# Altium PCB Group24_87557913_98040483_PCB_Wacky_R_CAR.PcbDoc (part 1 of 2)
Units mm, origin at the board's own origin, x right, y up, seen from the top; angles counter-clockwise.
Board outline 64 x 85 mm, 4 copper layers (Top Layer, Int1 (GND), Int2 (PWR), Bottom Layer), stack 1.369 mm thick; 115 components, 69 nets, 321 pads, 83 vias.
Unrouted connection lines stored in the file: 71.
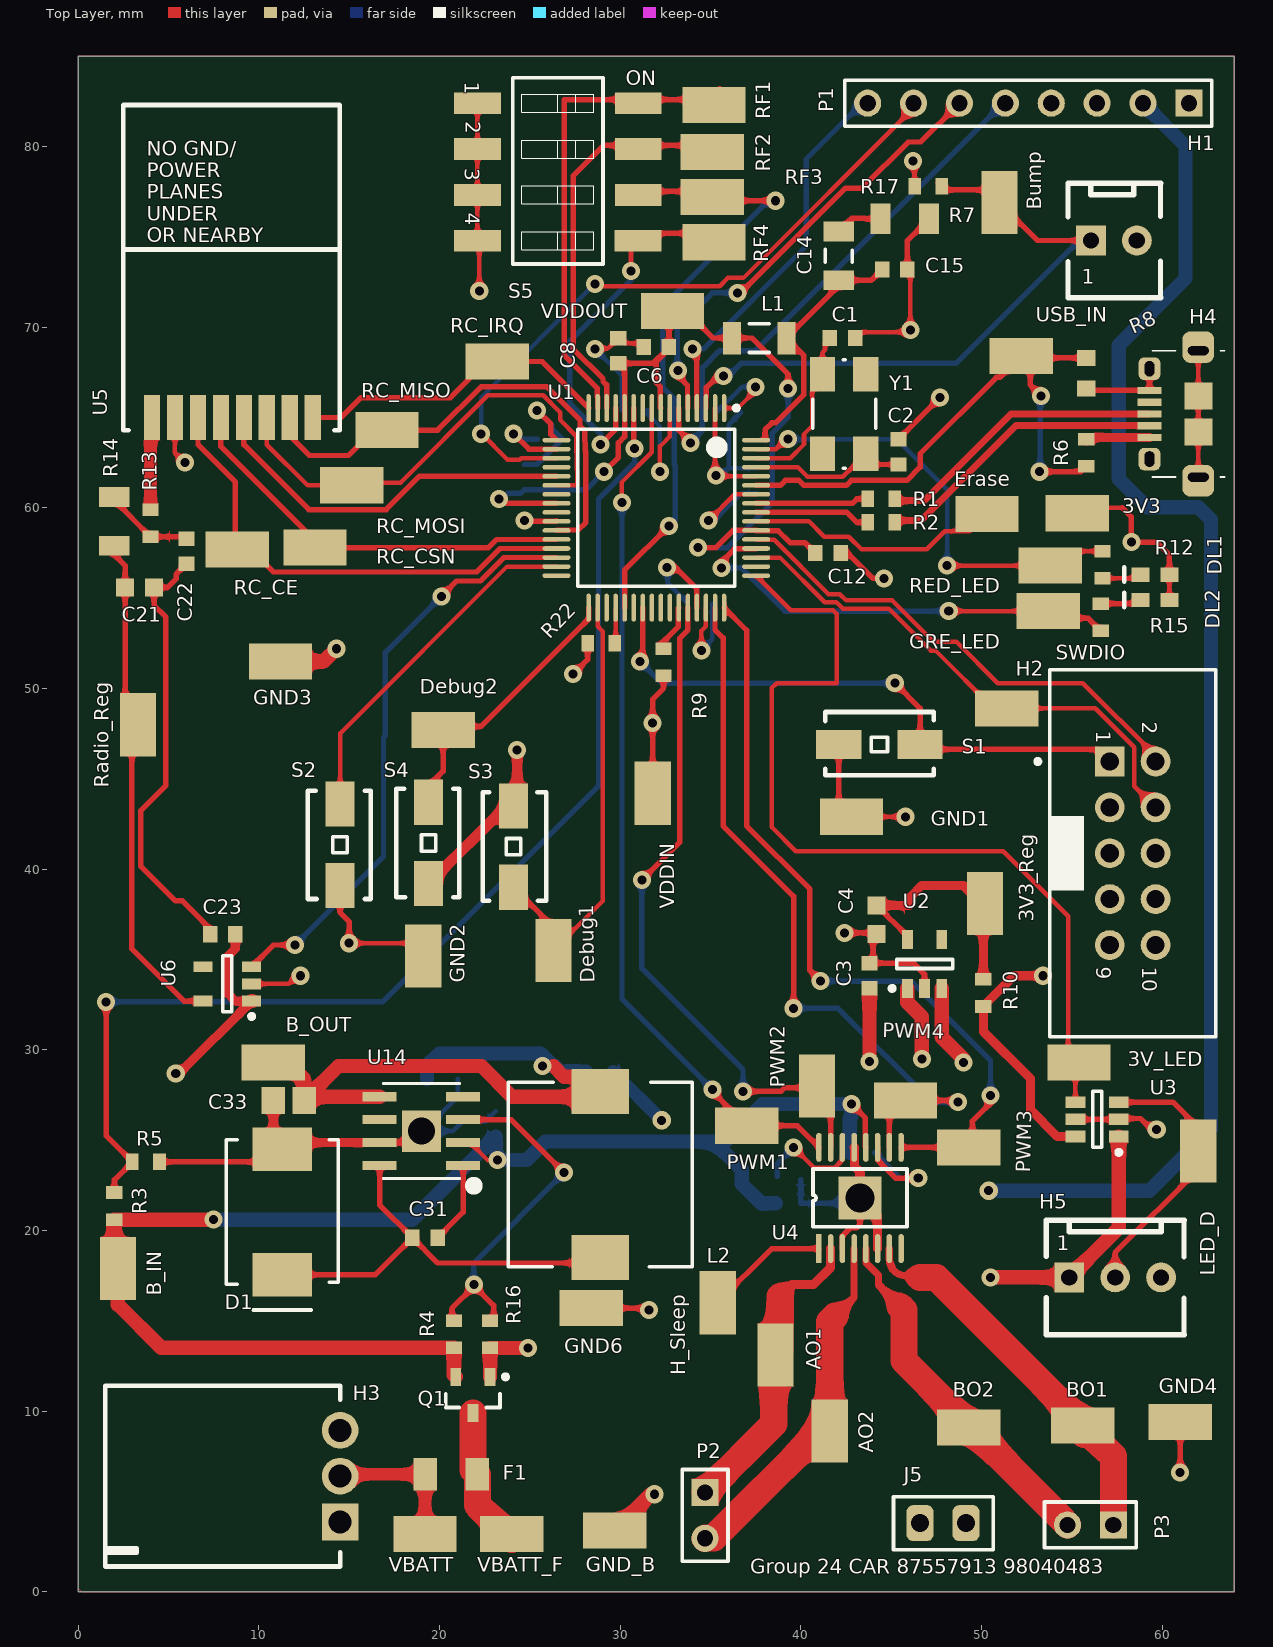
[diagram p0: Top Layer view]
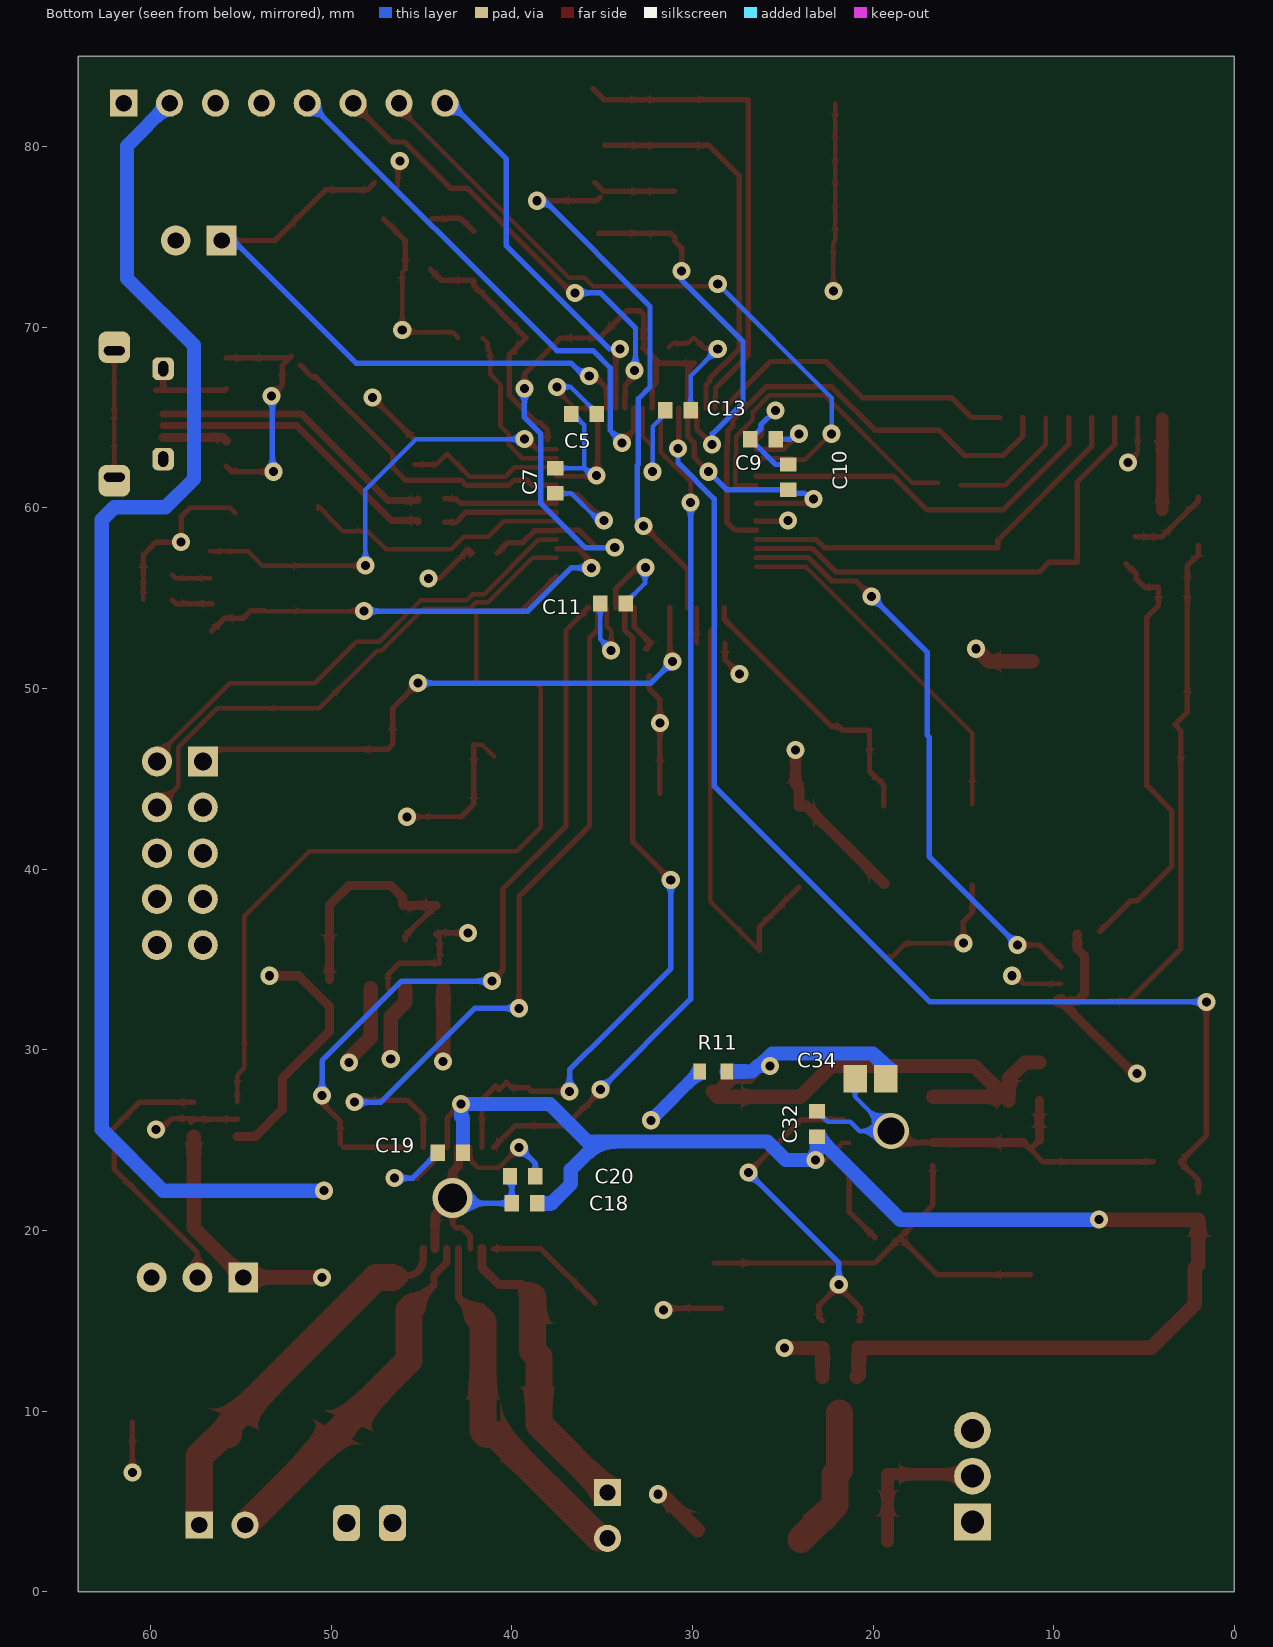
[diagram p1: Bottom Layer view, seen from below]
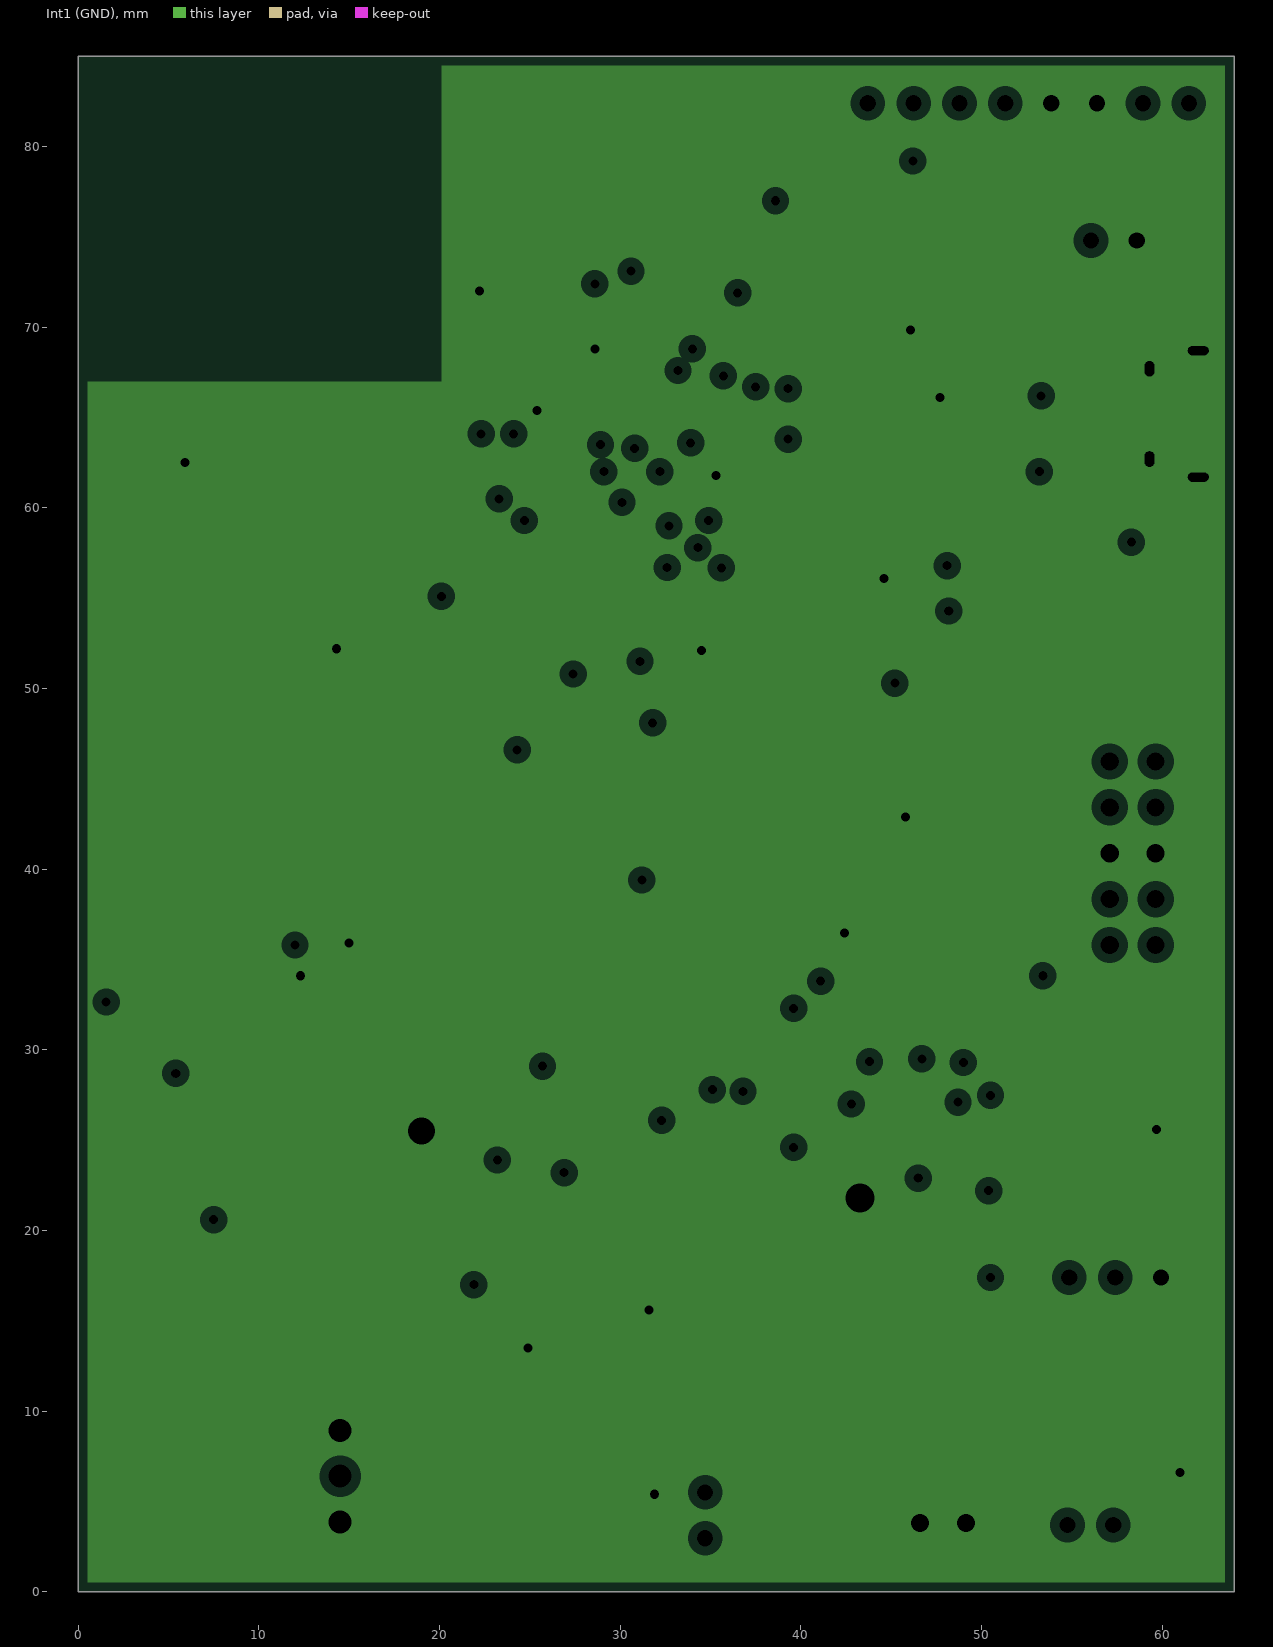
[diagram p2: Int1 (GND), clearances drawn from the general rule]
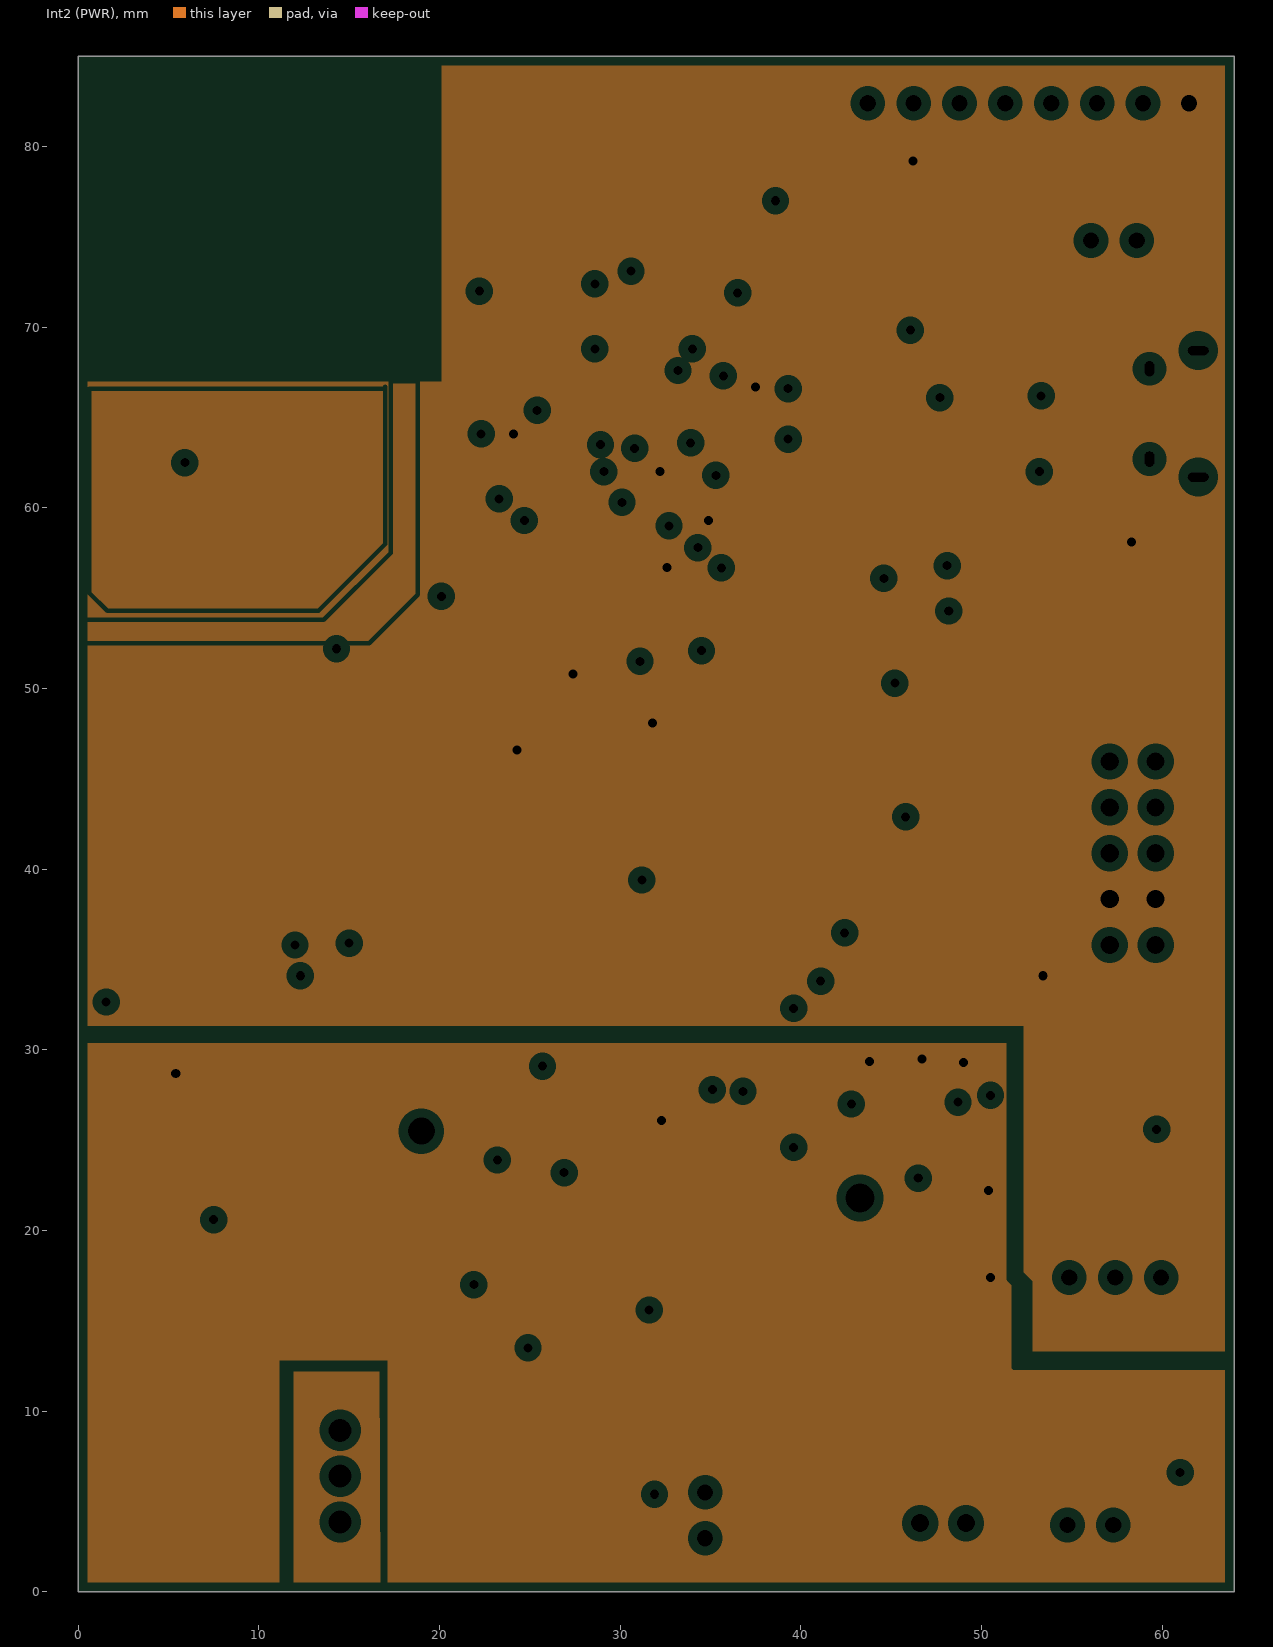
[diagram p3: Int2 (PWR), clearances drawn from the general rule]

## Layer stack, top to bottom
Top Solder: solder mask 0.0254, SM-001, Dk 4
Top Layer: signal copper 0.035
Dielectric 1: prepreg 0.1295, PP-017, Dk 4.3
Dielectric 2: prepreg 0.1295, PP-017, Dk 4.3
Int1 (GND): plane copper 0.035, net GND
Dielectric 3: core 0.7112, Core-039, Dk 4.8
Int2 (PWR): plane copper 0.035, net (Multiple Nets)
Dielectric 4: prepreg 0.1295, PP-017, Dk 4.3
Dielectric 5: prepreg 0.1295, PP-017, Dk 4.3
Bottom Layer: signal copper 0.035
Bottom Solder: solder mask 0.0254, SM-001, Dk 4

## Board outline
0,85 64,85 64,0 0,0 0,85

## Design rules (kind name [scope] priority, off if disabled: settings)
BoardOutlineClearance [All] p1: gap=0.5 ignorepadtopadclearanceinfootprint=FALSE
Clearance GND_POLY [InNamedPolygon('GND')] p1: gap=0.254 ignorepadtopadclearanceinfootprint=FALSE
Clearance Min_Clearance_Circuit_Labs [All] p2: gap=0.2 ignorepadtopadclearanceinfootprint=FALSE
DiffPairsRouting [All] p1: maxlimit=0.254 minlimit=0.254 mostfreqgap=0.254 toplayer_minwidth=0.381 toplayer_maxwidth=0.381 toplayer_prefwidth=0.381 bottomlayer_minwidth=0.381 bottomlayer_maxwidth=0.381 bottomlayer_prefwidth=0.381 maxuncoupledlength=12.7
FanoutControl Fanout_BGA [IsBGA] p1 off: bgadir=Out bgaviamode=Centered fanoutstyle=Auto fanoutdirection=Alternating viagrid=0.025 // Fanout_BGA (Default Rule)
Height [All] p1: minheight=0 maxheight=50.8 prefheight=12.7
HoleSize [All] p1: absolutevalues=TRUE maxlimit=10 minlimit=0.3 maxpercent=80.000 minpercent=20.000
MinimumAnnularRing [All] p1: minimumring=0.1
MinimumSolderMaskSliver [All] p1: minsoldermaskwidth=0.102
NetAntennae [All] p1: netantennaetolerance=1
PlaneClearance [All] p1: clearance=0.508
PlaneConnect [All] p1: planeconnectstyle=Relief reliefexpansion=0.508 reliefentries=4 reliefconductorwidth=0.254 reliefairgap=0.254
PolygonConnect [All] p1: connectstyle=Relief reliefconductorwidth=0.305 reliefentries=4 polygonreliefangle="90 Angle" airgapwidth=0.254
RoutingVias [All] p1: holewidth=0.5 width=1 viastyle="Through Hole" minholewidth=0.3 minwidth=0.8 maxholewidth=1 maxwidth=2
SMDNeckDown [All] p1 off: percent=50.000
SMDToCorner [All] p1: distance=98425
SMDToPlane [All] p1: distance=1968504
SilkToSolderMaskClearance SilkscreenOverComponentPads [IsPad] p1: minsilkscreentomaskgap=0.2 clearancetoexposedcopper=TRUE
SolderMaskExpansion [All] p1: expansion=0.102
ViasUnderSMD [All] p1: allowed=FALSE
Width [All] p1: maxlimit=2 minlimit=0.2 preferedwidth=0.3
21 further rules are at their usual default settings.

## Classes and differential pairs
component class Wacky_Racers_extras: 3V_LED AO1 AO2 BO1 BO2 C18 C19 C20 C21 C22 C23 Debug1 Debug2 DL1 DL2 GND6 GRE_LED H4 H5 H_Sleep LED_D P2 P3 PWM1 PWM2 PWM3 PWM4 R6 R8 R12 R13 R14 R15 Radio_Reg RC_CE RC_CSN RC_IRQ RC_MISO RC_MOSI RED_LED RF1 RF2 RF3 RF4 S3 S4 S5 U3 U4 U5 U6 USB_IN
component class Wacky_Racers_87557913: 3V3 3V3_Reg B_IN B_OUT Bump C1 C2 C3 C4 C5 C6 C7 C8 C9 C10 C11 C12 C13 C14 C15 C31 C32 C33 C34 D1 Erase F1 GND1 GND2 GND3 GND4 GND_B H1 H2 H3 J5 L1 L2 P1 Q1 R1 R2 R3 R4 R5 R7 R9 R10 R11 R16 R17 R22 S1 S2 SWDIO U1 U2 U14 VBATT VBATT_F VDDIN VDDOUT Y1
differential pair D: +D_P -D_N

## Components (designator, comment, footprint, x,y, rotation, side; value= is the part's Value field where it differs from the comment)
3V3 "TP" TP_1206 55.3,59.7 r0 top
3V3_Reg "TP" TP_1206 50.2,38.1 r90 top
3V_LED "TP" TP_1206 55.4,29.3 r180 top
AO1 "TP" TP_1206 38.6,13.1 r90 top
AO2 "TP" TP_1206 41.6,8.9 r270 top
B_IN "TP" TP_1206 2.2,17.9 r90 top
B_OUT "TP" TP_1206 10.8,29.3 r0 top
BO1 "TP" TP_1206 55.6,9.2 r0 top
BO2 "TP" TP_1206 49.3,9.1 r0 top
Bump "TP" TP_1206 51,76.9 r270 top
C1 "27pF" CAPC1608L 42.3,69.4 r180 top
C2 "27pF" CAPC1608L 45.4,63.1 r270 top
C3 "1uF" CAPC1608L 43.8,34.1 r270 top
C4 "4.7uF" CAPC1608N 44.2,37.2 r90 top
C5 "100nF" CAPC1608L 36,65.2 r180 bottom
C6 "100nF" CAPC1608L 32,68.9 r180 top
C7 "100nF" CAPC1608L 37.6,61.5 r270 bottom
C8 "100nF" CAPC1608L 29.9,68.7 r90 top
C9 "100nF" CAPC1608L 26.1,63.8 r180 bottom
C10 "100nF" CAPC1608L 24.7,61.7 r90 bottom
C11 "100nF" CAPC1608L 34.4,54.7 r180 bottom
C12 "100nF" CAPC1608L 41.5,57.5 r0 top
C13 "100nF" CAPC1608L 30.8,65.4 r180 bottom
C14 "47uF" CAPC3216L 42.1,73.95 r270 top
C15 "100nF" CAPC1608L 45.2,73.2 r180 top
C18 "10uF" CAPC1608L 39.3,21.5 r180 bottom
C19 "10nF" CAPC1608L 43.4,24.3 r180 bottom
C20 "2.2uF" CAPC1608L 39.4,23 r180 bottom
C21 "4.7uF" CAPC1608N 3.4,55.6 r180 top
C22 "10uF" CAPC1608L 6,57.6 r90 top
C23 "1uF" CAPC1608L 8,36.4 r0 top
C31 "100nF" CAPC1608L 19.2,19.6 r0 top
C32 "10uF" CAPC1608L 23.1,25.9 r270 bottom
C33 "CC_47uF_0805_6V3" CAPC2012N 11.65,27.2 r0 top
C34 "CC_47uF_0805_6V3" CAPC2012N 20.15,28.4 r180 bottom
D1 "VS-30BQ015-M3/9AT" SMC 11.3,21.025 r270 top
Debug1 "TP" TP_1206 26.3,35.5 r270 top
Debug2 "TP" TP_1206 20.2,47.7 r0 top
DL1 "Red" WL-SMCW0603 58.8,56.3 r0 top
DL2 "Green" WL-SMCW0603 58.8,54.9 r0 top
Erase "TP" TP_1206 50.3,59.65 r180 top
F1 "5A" RESC3216N 20.65,6.5 r180 top
GND1 "TP" TP_1206 42.8,42.9 r180 top
GND2 "TP" TP_1206 19.1,35.2 r270 top
GND3 "TP" TP_1206 11.2,51.5 r0 top
GND4 "TP" TP_1206 61,9.4 r0 top
GND6 "TP" TP_1206 28.4,15.7 r180 top
GND_B "TP" TP_1206 29.7,3.4 r0 top
GRE_LED "TP" TP_1206 53.7,54.3 r180 top
H1 "2 Pin Molex KK HDR" MOLEX_KK_2_HDR 56.06,74.8 r0 top
H2 "Header 5X2 Vert" IDC2.54-V10D 58.37,40.88 r270 top
H3 "Battery_HEADER_3pin" BATT_HEADER_3POS 14.5,6.4 r90 top
H4 "JS_USB_MICRO_B" FCI_USB_10118194-0001LF 63.45,65.2 r90 top
H5 "3 Pin Molex KK Hdr" MOLEX_KK_3_HDR 54.86,17.4 r0 top
H_Sleep "TP" TP_1206 35.4,16 r90 top
J5 "100Mil Jumper" JMP2.54 46.6,3.8 r0 top
L1 "1A max, Idc 0.3R," INDC3216L 37.7,69.4 r180 top
L2 "IND 5.2UH 6A" INDUCTOR5u2 28.9,23.1 r90 top
LED_D "TP" TP_1206 62,24.4 r90 top
P1 "JA_PIN_Header 8" HDR1X8 61.48,82.4 r180 top
P2 "JA_PIN_Header 2" HDR1X2 34.7,5.5 r270 top
P3 "JA_PIN_Header 2" HDR1X2 57.3,3.7 r180 top
PWM1 "TP" TP_1206 37,25.8 r180 top
PWM2 "TP" TP_1206 40.9,28 r90 top
PWM3 "TP" TP_1206 49.3,24.6 r0 top
PWM4 "TP" TP_1206 45.8,27.2 r0 top
Q1 "SSM3J328R,LF" SOT23_L 21.85,10.9 r270 top
R1 "27R" RESC1608L 44.45,60.5 r180 top
R2 "27R" RESC1608L 44.45,59.2 r180 top
R3 "150K" RESC1608L 2,21.35 r270 top
R4 "#NAME?" RESC1608L 20.8,14.25 r270 top value=180K
R5 "100K" RESC1608L 3.75,23.8 r180 top
R6 "27K" RESC1608L 55.8,63.05 r90 top
R7 "1R" RESC3216L 45.75,76 r180 top
R8 "47K" RESC1608N 55.8,67.45 r90 top
R9 "4K7" RESC1608L 32.4,51.45 r90 top
R10 "0R" RESC1608L 50.1,33.15 r270 top
R11 "0R" RESC1608L 28.85,28.8 r180 bottom
R12 "3K3" RESC1608L 56.7,56.85 r90 top
R13 "0R" RESC1608L 4,59.15 r90 top
R14 "1R" RESC3216L 2,59.25 r90 top
R15 "2K" RESC1608L 56.6,53.95 r270 top
R16 "56K" RESC1608L 22.8,14.25 r90 top
R17 "4K7" RESC1608L 47.05,77.8 r180 top
R22 "4K7" RESC1608L 28.95,52.5 r0 top
Radio_Reg "TP" TP_1206 3.3,48 r270 top
RC_CE "TP" TP_1206 8.8,57.7 r180 top
RC_CSN "TP" TP_1206 13.1,57.8 r0 top
RC_IRQ "TP" TP_1206 23.2,68.1 r0 top
RC_MISO "TP" TP_1206 17.1,64.3 r180 top
RC_MOSI "TP" TP_1206 15.146,61.25 r0 top
RED_LED "TP" TP_1206 53.8,56.8 r0 top
RF1 "TP" TP_1206 35.2,82.3 r0 top
RF2 "TP" TP_1206 35.1,79.7 r0 top
RF3 "TP" TP_1206 35.1,77.2 r0 top
RF4 "TP" TP_1206 35.2,74.7 r0 top
S1 "EVQPNF05M" EVQPNF05M 44.35,46.9 r0 top
S2 "EVQPNF05M" EVQPNF05M 14.5,41.35 r90 top
S3 "EVQPNF05M" EVQPNF05M 24.1,41.25 r270 top
S4 "EVQPNF05M" EVQPNF05M 19.4,41.45 r90 top
S5 "WS_SW DIP-4" "DIP_SW_4WAY_SMD -" 22.1,82.4 r270 top
SWDIO "TP" TP_1206 51.4,48.9 r180 top
U1 "ATSAM4S8BA-ANR" LQFP64_L 32,60 r270 top locked
U2 "CAT6219-330TDGT3" SOT95P280X145-5N 46.85,34.75 r90 top
U3 "SN74LVC1T45" SOT23-6_N 56.4,26.15 r180 top
U4 "DRV8833" "HTSOP16 DRV8833" 41,19 r90 top locked
U5 "nRF24 SMD" NRF24 2.486,64.3 r0 top
U6 "CAT6219-330TDGT3" SOT95P280X145-5N 8.25,33.65 r180 top
U14 "ADP2302ARDZ-5.0 BUCK" RD_8_1 19,25.5 r180 top locked value=Value
USB_IN "TP" TP_1206 52.2,68.4 r0 top
VBATT "TP" TP_1206 19.2,3.2 r0 top
VBATT_F "TP" TP_1206 24,3.2 r0 top
VDDIN "TP" TP_1206 31.8,44.2 r90 top
VDDOUT "TP" TP_1206 32.9,70.9 r180 top
Y1 "12MHz" 6.0X3.5-4 42.4,65.2 r90 top

## Footprints (in the part's own frame and the unit in brackets; to place one, negate y for a bottom-side part, rotate by r counter-clockwise, add the part's x,y. Pads: shape width x height; smd on the part's side, far side on the other; paste and mask are expansions set on the pad)
6.0X3.5-4 [mm] "4 SMD 6.0X3.5 mm No Lead Crystal"
  rect 1.9x1.4 smd: 1(-2.2,-1.2) 2(2.2,-1.2) 3(2.2,1.2) 4(-2.2,1.2)
  silkscreen extent -3,-1.75 3,1.75, body extent -3,-1.75 3,1.75, height 1.2
BATT_HEADER_3POS [mil]
  rect 80x80 hole 50: 1(-100,0)
  round 80 hole 50: 2(0,0) 3(100,0)
  silkscreen extent -197,0 197,512, body extent -197,-31 200,504, height 294
CAPC1608L [mm] "Chip Capacitor, Body 1.6x0.8mm, IPC High Density"
  rect 0.8x0.9 smd: 1(-0.7,0) 2(0.7,0)
  body extent -0.87,-0.48 0.87,0.48, height 0.85
CAPC1608N [mm] "Chip Capacitor, Body 1.6x0.8mm, IPC Medium Density"
  rect 1x1 smd: 1(-0.8,0) 2(0.8,0)
  body extent -0.87,-0.48 0.87,0.48, height 0.85
CAPC2012N [mm] "Chip Capacitor, Body 2.0x1.3mm, IPC Medium Density"
  rect 1.3x1.5 smd: 1(-0.85,0) 2(0.85,0)
  body extent -1.1,-0.72 1.1,0.72, height 1.1
CAPC3216L [mm] "Chip Capacitor, Body 3.2x1.6mm, IPC High Density"
  rect 1.1x1.7 smd: 1(-1.35,0) 2(1.35,0)
  silkscreen extent -0.35,-0.75 0.35,0.75, body extent -1.7,-0.9 1.7,0.9, height 1.35
"DIP_SW_4WAY_SMD -" [mm] "DIP Switch; 8 Leads"
  rect 1.2x2.6 smd: 1(0,0) 2(2.54,0) 3(5.08,0) 4(7.62,0) 5(7.62,8.89) 6(5.08,8.9) 7(2.54,8.9) 8(0,8.9)
  silkscreen extent -1.4,1.95 8.9,6.95
EVQPNF05M [mm] "Panansonic light touch SMD push button switch"
  rect 2.5x1.6 smd: 1(-2.25,0) 2(2.25,0)
  silkscreen extent -3,-1.7 3,1.8, body extent -3,-1.7 3,1.8, height 5
FCI_USB_10118194-0001LF [mm] "Micro USB B Type Receptacle"
  rect 0.4x1.35 smd mask+0.07: 1(-1.3,4.15) 2(-0.65,4.15) 3(0,4.15) 4(0.65,4.15) 5(1.3,4.15)
  rrect50% 1.75x1.75 hole 0.5 slot 1.15 at 90 deg copper offset -0.2,0 paste+0 mask+0.1: 6(-3.5,1.45)
  rrect50% 1.25x1.2 hole 0.55 slot 0.85 at 0 deg: 6(-2.5,4.15) 6(2.5,4.15)
  rect 1.5x1.55 smd: 6(-1,1.45) 6(1,1.45)
  rrect50% 1.75x1.75 hole 0.5 slot 1.15 at 90 deg copper offset 0.2,0 paste+0 mask+0.1: 6(3.5,1.45)
  silkscreen extent -3.5,0 3.5,4
HDR1X2 [mm] "Connector; Header; 2 Position"
  rect 1.5x1.5 hole 0.9: 1(0,0)
  round 1.5 hole 0.9: 2(2.54,0)
  silkscreen extent -1.27,-1.27 3.81,1.27, body extent -1.25,-1.25 3.79,1.25, height 8.54
HDR1X8 [mm] "Connector; Header; 8 Position"
  rect 1.5x1.5 hole 0.9: 1(0,0)
  round 1.5 hole 0.9: 2(2.54,0) 3(5.08,0) 4(7.62,0) 5(10.16,0) 6(12.7,0) 7(15.24,0) 8(17.78,0)
  silkscreen extent -1.27,-1.27 19.05,1.27, body extent -1.24,-1.3 19.04,1.2, height 8.54
"HTSOP16 DRV8833" [mm]
  rect 1.6x0.3 smd: 1(0,0)
  oval 1.6x0.3 smd: 2(0,-0.65) 3(0,-1.3) 4(0,-1.95) 5(0,-2.6) 6(0,-3.25) 7(0,-3.9) 8(0,-4.55) 9(5.6,-4.55) 10(5.6,-3.9) 11(5.6,-3.25) 12(5.6,-2.6) 13(5.6,-1.95) 14(5.6,-1.3) 15(5.6,-0.65) 16(5.6,0)
  rect 2.4x2.4 smd: 17(2.8,-2.275)
  silkscreen extent 1.2,-4.88 4.4,0.33, body extent -0.4,-4.77 6,0.23, height 1.13
IDC2.54-V10D [mm] "Connector; IDC, Low Profile Male Header, Thru-Hole; 10 Position; Vertical; Pitch 2.54 mm; Body 20.32 x 9.2 x 9.45 mm (LxWxH)"
  rect 1.65x1.65 hole 1: 1(-5.08,-1.27)
  round 1.65 hole 1: 2(-5.08,1.27) 3(-2.54,-1.27) 4(-2.54,1.27) 5(0,-1.27) 6(0,1.27) 7(2.54,-1.27) 8(2.54,1.27) 9(5.08,-1.27) 10(5.08,1.27)
  silkscreen extent -10.16,-5.37 10.16,4.6, body extent -10.16,-4.6 10.16,4.6, height 9.45
INDC3216L [mm] "Chip Inductor, Body 3.2x1.6mm, IPC High Density"
  rect 1x1.8 smd: 1(-1.5,0) 2(1.5,0)
  silkscreen extent -0.55,-0.8 0.55,0.8, body extent -1.75,-0.95 1.75,0.95, height 1.9
INDUCTOR5u2 [mm]
  rect 2.5x3.2 smd: 1(-4.6,0) 2(4.6,0)
  silkscreen extent -5.1,-5.1 5.1,5.1, body extent -5,-5 5,5, height 3.8
JMP2.54 [mm] "Jumper Change over 2.54mm"
  rrect50% 1.5x2 hole 1: 1(0,0) 2(2.544,0)
  silkscreen extent -1.47,-1.47 4.05,1.47, body extent -1.43,-1.43 4.05,1.43, height 8.45
LQFP64_L [mm] "Thin QFP, 64-Leads, Body 10x10mm, Pitch 0.5mm, IPC High Density"
  oval 1.55x0.25 smd mask+0.07: 1(-5.525,3.75) 2(-5.525,3.25) 3(-5.525,2.75) 4(-5.525,2.25) 5(-5.525,1.75) 6(-5.525,1.25) 7(-5.525,0.75) 8(-5.525,0.25) 9(-5.525,-0.25) 10(-5.525,-0.75) 11(-5.525,-1.25) 12(-5.525,-1.75) 13(-5.525,-2.25) 14(-5.525,-2.75) 15(-5.525,-3.25) 16(-5.525,-3.75) 33(5.525,-3.75) 34(5.525,-3.25) 35(5.525,-2.75) 36(5.525,-2.25) 37(5.525,-1.75) 38(5.525,-1.25) 39(5.525,-0.75) 40(5.525,-0.25) 41(5.525,0.25) 42(5.525,0.75) 43(5.525,1.25) 44(5.525,1.75) 45(5.525,2.25) 46(5.525,2.75) 47(5.525,3.25) 48(5.525,3.75)
  oval 0.25x1.55 smd mask+0.07: 17(-3.75,-5.525) 18(-3.25,-5.525) 19(-2.75,-5.525) 20(-2.25,-5.525) 21(-1.75,-5.525) 22(-1.25,-5.525) 23(-0.75,-5.525) 24(-0.25,-5.525) 25(0.25,-5.525) 26(0.75,-5.525) 27(1.25,-5.525) 28(1.75,-5.525) 29(2.25,-5.525) 30(2.75,-5.525) 31(3.25,-5.525) 32(3.75,-5.525) 49(3.75,5.525) 50(3.25,5.525) 51(2.75,5.525) 52(2.25,5.525) 53(1.75,5.525) 54(1.25,5.525) 55(0.75,5.525) 56(0.25,5.525) 57(-0.25,5.525) 58(-0.75,5.525) 59(-1.25,5.525) 60(-1.75,5.525) 61(-2.25,5.525) 62(-2.75,5.525) 63(-3.25,5.525) 64(-3.75,5.525)
  silkscreen extent -5.65,-4.35 4.35,4.55, body extent -5,-5 5,5, height 1.6
MOLEX_KK_2_HDR [mil] "MOLEX_KK_2_HDR"
  rect 65x65 hole 35.43: 1(0,0)
  round 65 hole 35.43: 2(100,0)
  silkscreen extent -50,-125 152,125, body extent -42,-124 152,126, height 420
MOLEX_KK_3_HDR [mil] "MOLEX_KK_3_HDR"
  rect 65x65 hole 35.43: 1(0,0)
  round 65 hole 35.43: 2(100,0) 3(200,0)
  silkscreen extent -50,-125 250,125, body extent -50,-114 250,114, height 461
NRF24 [mm]
  rect 0.9x2.5 smd: 1(1.6,0.7) 2(2.871,0.7) 3(4.143,0.7) 4(5.414,0.7) 5(6.686,0.7) 6(7.957,0.7) 7(9.229,0.7) 8(10.5,0.7)
  silkscreen extent 0,0 12,18, body extent 0,0 12,18, height 2.27
RD_8_1 [mil]
  rect 74x20 smd paste+0 mask+0: 1(-91,75) 2(-91,25) 3(-91,-25) 4(-91,-75) 5(91,-75) 6(91,-25) 7(91,25) 8(91,75)
  rect 84.65x90 smd paste-44.5 mask+0: EPAD(0,0)
  silkscreen extent -118,-104 84,123, body extent 0,0 10,10, height 10
RESC1608L [mm] "Chip Resistor, Body 1.6x0.8mm, IPC High Density"
  rect 0.7x0.9 smd: 1(-0.75,0) 2(0.75,0)
  body extent -0.85,-0.48 0.85,0.48, height 0.9
RESC1608N [mm] "Chip Resistor, Body 1.6x0.8mm, IPC Medium Density"
  rect 0.9x1 smd: 1(-0.85,0) 2(0.85,0)
  body extent -0.85,-0.48 0.85,0.48, height 0.6
RESC3216L [mm] "Chip Resistor, Body 3.1x1.6mm, IPC High Density"
  rect 1.1x1.7 smd: 1(-1.35,0) 2(1.35,0)
  body extent -1.68,-0.87 1.68,0.87, height 2.54
RESC3216N [mm] "Chip Resistor, Body 3.2x1.6mm, IPC Medium Density"
  rect 1.3x1.8 smd: 1(-1.45,0) 2(1.45,0)
  body extent -1.68,-0.87 1.68,0.87, height 0.71
SMC [mm] "DO-214-AB/SMC; 2 C-Bend Leads; Body 7.9 x 5.9 mm, inc. leads (LxW)"
  rect 2.4x3.3 smd: 1(-3.475,0) 2(3.475,0)
  silkscreen extent -4,-3.1 5.43,3.1
SOT23-6_N [mm]
  rect 1.1x0.65 smd: 1(-1.2,0.95) 2(-1.2,0) 3(-1.2,-0.95) 4(1.2,-0.95) 5(1.2,0) 6(1.2,0.95)
  silkscreen extent -1.33,-1.55 0.25,1.95, body extent -0.9,-1.55 0.9,1.55, height 1.45
SOT23_L [mm] "SOT23, 3-Leads, Body 2.9x1.3mm, Pitch 0.95mm, Lead Span 2.3mm, IPC High Density"
  rect 1x0.6 smd: 1(-1,0.95) 2(-1,-0.95) 3(1,0)
  silkscreen extent -1.12,-1.5 0.7,1.93, body extent -0.7,-1.5 0.7,1.5, height 1.1
SOT95P280X145-5N [mm] "SOT23, 5-Leads, Body 2.90x2.80mm, Pitch 0.95mm, IPC Medium Density"
  rect 1.05x0.6 smd: 1(-1.35,0.95) 2(-1.35,0) 3(-1.35,-0.95) 4(1.35,-0.95) 5(1.35,0.95)
  silkscreen extent -1.47,-1.55 0.25,1.92, body extent -0.87,-1.52 0.87,1.53, height 1.45
TP_1206 [mm] "Test Point Pad"
  rect 3.5x2 smd: 1(0,0)
  body extent -1.62,-0.85 1.63,0.8, height 2
WL-SMCW0603 [mm] "2.4 x 0.8 x 0.7mm LED"
  rect 1x0.8 smd: 1(0,0) 2(1.6,0)
  silkscreen extent -0.9,-0.4 -0.9,0.4

## Part data
3V3 3V3_Reg 3V_LED AO1 AO2 B_IN B_OUT BO1 BO2 Bump Debug1 Debug2 Erase GND1 GND2 GND3 GND4 GND6 GND_B GRE_LED H_Sleep LED_D PWM1 PWM2 PWM3 PWM4 Radio_Reg RC_CE RC_CSN RC_IRQ RC_MISO RC_MOSI RED_LED RF1 RF2 RF3 RF4 SWDIO USB_IN VBATT VBATT_F VDDIN VDDOUT: library part TP_1206, "Test-Point 3.3x1.6x2.1mm SMD", Manufacturer="Harwin Inc", Manufacturer Part Number=S1751-46R, Supplier Part Number 1=952-1478-2-ND, Mounting Type="Surface Mount", Storage Location=ProtoPlace, Supplier="ECE Dept", Supplier 1=Digi-Key, Supplier 2=Farnell, Supplier Part Number 2=1826282, Type="PC Test Point"
C1 C2: library part CC_27pF_0603, "CAP CER 27pF NPO/COG +-5% 50V 0603", Code_IPC="1608 [0603]", PackageReference=0603, Storage Location="PCB Assembly WS", Supplier="ECE Dept"
C3 C23: library part CC_1uF_0603, "CAP CER 1uF Y5V -20% +80% 16V 0603", Max Voltage=16V, Code_IPC="1608 [0603]", PackageReference=0603, Storage Location="PCB Assembly WS", Supplier="ECE Dept"
C4 C21: library part CC_4.7uF_0603, "CAP CER 4.7uF X5R +-20%  10V 0603", Max Voltage=10V, Code_IPC=2012[0805], Note="Footprint corresponds to dimensions for bulk cassette packaging. This case size has tightened tolerances.", PackageReference=0805, Storage Location="PCB Assembly WS", Supplier="ECE Dept"
C5 C6 C7 C8 C9 C10 C11 C12 C13 C15 C31: library part CC_100nF_0603, "CAP CER 100nF X7R +-10% 50V 0603", Code_IPC="1608 [0603]", PackageReference=0603, Storage Location="PCB Assembly WS", Supplier="ECE Dept"
C14: library part CC_47uF_1206, "CAP CER 47uF X5R -/+20% 10V 1206", Dielectric=X5R, Max Voltage=10V, MoV=10V, Storage Location="PCB Assembly WS", Supplier="ECE Dept"
C18 C22 C32: library part CC_10uF_0603, "CAP CER 10UF X5R +-20% 6V3 0603", Voltage - Rated=6.3V, Storage Location="PCB Assembly WS", Supplier="ECE Dept"
C19: library part CC_10nF_0603, "CAP CER 10nF X7R +-10% 50V 0603", Code_IPC="1608 [0603]", PackageReference=0603, Storage Location="PCB Assembly WS", Supplier="ECE Dept"
C20: library part CC_2.2uF_0603, "CAP CER 2.2uF X5R +-20% 10V 0603", Max Voltage=10V, Code_IPC="1608 [0603]", PackageReference=0603, Storage Location="PCB Assembly WS", Supplier="ECE Dept"
C33 C34: "SAMSUNG ELECTRO-MECHANICS - CL21A476MQCLRNC - CAP, 47UF, 6.3V, MLCC, 0805", Capacitance=47uF, Case/Package=0805, Case Code (Metric)=2012, Dielectric=X5R, Manufacturer 1=Samsung, Manufacturer Part Number 1=CL21A476MQCLRNC, Max Operating Temperature=85°C, Min Operating Temperature=-55°C, Package Quantity=4000, Supplier Part Number 1=1276-2420-1-ND, Tolerance=20%, Voltage Rating=6V3, Case Code (Imperial)=0805, ComponentLink1Description=https://datasheet.ciiva.com/25723/cl21a476mqclrnc-25723991.pdf?src-supplier=Digi-Key, ComponentLink1URL=https://datasheet.ciiva.com/25723/cl21a476mqclrnc-25723991.pdf?src-supplier=Digi-Key, Construction=Flat, Contact Plating=Tin, Depth=1.25mm, Lead Free="Lead Free", Length=2mm, Mount="Surface Mount", Packaging="Tape and Reel", Pricing 1="1=0.56000, 10=0.39100, 50=0.27380, 100=0.23470, 500=0.17602, 1000=0.14865 (USD)", RoHS=Yes, RoHS Compliant=Yes, Series=CL, Stock 1=94580, Supplier 1=Digi-Key, Termination=Wraparound, Thickness=0.037inch, Width=0.049inch
D1: library part DS_VS-30BQ015-M3, "DIODE, SCHOTTKY, 3A, 15V, DO-214AB / SMC", Average Rectified Current=3A, Forward Voltage=350mV, Manufacturer="Vishay Semiconductors", Max Forward Surge Current (Ifsm)=650A, Max Reverse Voltage (DC)=15V, Peak Reverse Current=4mA, Supplier Part Number=VS-30BQ015-M3/9AT-ND, Supplier Part Number 1=VS-30BQ015-M3/9ATGIDKR-ND, ComponentLink1Description=https://datasheet.ciiva.com/36181/vs-30bq015-m3-9at-36181258.pdf, ComponentLink1URL=https://datasheet.ciiva.com/36181/vs-30bq015-m3-9at-36181258.pdf, Manufacturer Part Number=VS-30BQ015-M3/9AT, Supplier=Digi-Key, Supplier 1=Digi-Key, Supplier 2=Element14, Supplier Part Number 2=2628288
DL1: library part DL_150060RS75000, "LED Red 250mcd 0603 SMD", Forward Current If=30, Forward Voltage=2, Manufacturer="WURTH ELEKTRONIK", Manufacturer Part Number=150060RS75000, Supplier Part Number 1=2322071, LED Colour=Red, LED Mounting=SMD, Lens Shape=Rectangular, Luminous Intensity=250, Storage Location="PCB Assembly WS", Supplier="ECE Dept", Supplier 1=Farnell, Viewing Angle=140°, Wavelength Typ=625
DL2: library part DL_150060GS75000, "LED Green 430mcd 0603 SMD", Forward Current If=30, Forward Voltage=3.2, Manufacturer="WURTH ELEKTRONIK", Manufacturer Part Number=150060GS75000, Supplier Part Number 1=2322070, LED Colour=Green, LED Mounting=SMD, Lens Shape=Rectangular, Luminous Intensity=430, Storage Location="PCB Assembly WS", Supplier="ECE Dept", Supplier 1=Farnell, Viewing Angle=140°, Wavelength Typ=520
F1: library part FS_Fuse_5.0A, "Fuse 5.0A Fast Acting 1206 SMD", Case/Package=1206, Case Code (Metric)=3216, DC Cold Resistance=19mR, Manufacturer="Bel TRP", Manufacturer Part Number=C1F5, Max Operating Temperature=125°C, Min Operating Temperature=-55°C, Supplier Part Number 1=507-1886-1-ND, Voltage Rating=125V, Voltage Rating (DC)=63V, Approvals=CE,cURus, Case Code (Imperial)=1206, ComponentLink1Description=http://www.farnell.com/datasheets/2571625.pdf, ComponentLink1URL=http://www.farnell.com/datasheets/2571625.pdf, ComponentLink2Description=http://belfuse.com/pdfs/C1F.pdf, ComponentLink2URL=http://belfuse.com/pdfs/C1F.pdf, ComponentLink3Description=http://www.mouser.com/ds/2/643/C1F-594910.pdf, ComponentLink3URL=http://www.mouser.com/ds/2/643/C1F-594910.pdf, ComponentLink4Description=https://belfuse.com/resources/StewartConnector/C1F.pdf, ComponentLink4URL=https://belfuse.com/resources/StewartConnector/C1F.pdf, Contact Plating=Nickel,Tin, Current Rating=5A, Fuse Type="Board Mount (Cartridge Style Excluded)", Length=0.126inch, Mount="Surface Mount", Number of Pins=2, Packaging="Tape and Reel", Pricing 1="1=0.32, 5=0.312, 10=0.298, 50=0.2662, 100=0.2479, 250=0.22032, 500=0.1836, 1000=0.17442 (USD)", Stock 1=725, Supplier 1=Digi-Key, Supplier 2=Element14, Supplier Part Number 2=2848595, Voltage Rating (AC)=125V, Width=0.062inch
H1: library part JA_MOLEX_KK_2POS, "CONN HEADER 2POS 2.54mm VERT_Thru Hole", Supplier Part Number 1=1462926, Storage Location="ECE Dept Store", Supplier="ECE Dept", Supplier 1=Farnell
H2: library part JA_HDR_IDC_5X2_VERT, "IDC Header, 2,54mm, 10-Pin, Vert", Supplier Part Number 1=1096985, Storage Location="ECE Dept Store", Supplier="ECE Dept", Supplier 1=Farnell
H3: "3Pin Header 2.54mm spacing / Digikey #WM22663-ND", Supplier Part Number 1=WM22663-ND, Supplier 1=Digi-Key
H4: library part JS_USB_MICRO_B_SMT, "CONN USB MICRO B RECPT SMT R/A", Manufacturer=FCI, Manufacturer Part Number=10118194-0001LF, Supplier Part Number 1=609-4618-1-ND, Features="Shielded, Solder Retention", Gender=Receptacle, Mounting Type="Surface Mount, Right Angle, Horizontal", Number of Contacts=5, Specifications="USB 2.0", Supplier 1=Digi-Key
H5: library part LED_Strip_Header, "CONN HEADER 3POS 2.54mm VERT_Thru Hole", Manufacturer=Molex, Manufacturer PN=22-23-2031, Supplier Part Number 1=9731156, Storage Location="ECE Dept Store", Supplier="ECE Dept", Supplier 1=Farnell
J5: library part TP_JUMPER, "2.54mm Jumper Thru Hole", Supplier Part Number 1=1097975, No. of Positions=2, No. of Rows=1, Pitch Spacing=2.54, Storage Location="ECE$ Store", Supplier="ECE Dept", Supplier 1=Farnell
L1: library part IN_Ferrite-Bead, "Ferrite Bead, Rdc 0.3R, Z100MHZ 600R, Imax 1A, SMD 1206", DC Current Rating=1, DC Resistance Max=0.08, Ferrite Case Style="1206 ^3216 Metric]", Frequency Range="50MHz to 1", Impedance Tolerance="± 25%", Manufacturer=FAIR-RITE, Manufacturer Part Number=2512066017Y1, Supplier Part Number 1=1612060, Ferrite Mounting=SMD, Impedance=600, Manufacturer PN=2512066017Y1, Storage Location="PCB Assembly WS", Supplier="ECE Dept", Supplier 1=Farnell
L2: library part CDRH104RNP-5R2NC, "FIXED IND 5.2UH 6A 22 MOHM SMD", Current - Saturation=5.6A, DC Resistance (DCR)="22 mOhm Max", Frequency - Self Resonant=-, Manufacturer="Sumida America Components Inc.", Operating Temperature="-40°C ~ 100°C", Package / Case=Nonstandard, Supplier Part Number 1=308-2280-1-ND, Tolerance=±30%, Category="Inductors, Coils, Chokes", ComponentLink1Description=http://products.sumida.com/products/pdf/CDRH104R.pdf, ComponentLink1URL=http://products.sumida.com/products/pdf/CDRH104R.pdf, Height - Seated (Max)="0.157\" (4.00mm)", Manufacturer Part Number=CDRH104RNP-5R2NC, Material - Core=Ferrite, Mounting Type="Surface Mount", Packaging="Cut Tape (CT)", Part Status=Active, Pricing 1="1=2.9, 10=2.678, 100=1.8743, 500=1.5173 (NZD)", Q @ Freq=-, Ratings=-, RoHS="RoHS Compliant", Shielding=Shielded, Size / Dimension="0.402\" L x 0.394\" W (10.20mm x 10.00mm)", Stock 1=3849, Supplier 1=Digi-Key, Supplier Device Package=-, Type=-
P1: "Header, 8-Pin", LatestRevisionDate=17-Jul-2002, LatestRevisionNote="Re-released for DXP Platform.", Publisher="Altium Limited"
P2 P3: "Header, 2-Pin", LatestRevisionDate=17-Jul-2002, LatestRevisionNote="Re-released for DXP Platform.", Publisher="Altium Limited"
Q1: library part TM_SSM3J328R, "MOSFET P-CH 20V 6A SOT23-3", Case/Package=SOT-23-3, Continuous Drain Current (ID)=6A, Drain to Source Breakdown Voltage=-20V, Drain to Source Resistance=47.4mR, Drain to Source Voltage (Vdss)=20V, Gate to Source Voltage (Vgs)=8V, Input Capacitance=840pF, Input Capacitance (Ciss) @ Vds="840pF @ 10V", Manufacturer=Toshiba, Max Operating Temperature=150°C, Max Power Dissipation=1W, Min Operating Temperature=-55°C, Package / Case="SOT-23-3 Flat Leads", Package Quantity=3000, Power Dissipation=2W, Supplier Device Package=SOT-23F, Supplier Part Number=SSM3J328RLFDKR-ND, ComponentLink1Description=https://datasheet.ciiva.com/11158/ssm3j328r-datasheet-en-20140301-11158652.pdf, ComponentLink1URL=https://datasheet.ciiva.com/11158/ssm3j328r-datasheet-en-20140301-11158652.pdf, Current - Continuous Drain (Id) @ 25° C=6A, Element Configuration=Single, FET Feature="Logic Level Gate, 1.5V Drive", FET Type="MOSFET P-Channel, Metal Oxide", Gate Charge (Qg) @ Vgs="12.8nC @ 4.5V", Manufacturer Part Number=SSM3J328R,LF, Mount="Surface Mount", Number of Channels=1, Number of Elements=1, Number of Pins=3, Packaging="Tape and Reel", Power - Max=1W, Pricing="1=0.79, 10=0.658, 25=0.5772, 100=0.4939, 250=0.42836, 500=0.36284, 1000=0.27972 (NZD)", Radiation Hardening=No, Rds On Max=29.8mR, Storage Location="PCB Assembly WS", Supplier=Digi-Key, Supplier 1=Digi-Key, Supplier Part Number 1=SSM3J328RLFDKR-ND, Turn-Off Delay Time=107ns, Turn-On Delay Time=32ns, Vgs(th) (Max) @ Id="1V @ 1mA"
R1 R2: library part RS_27R, "RES 27 OHM 1/10W 5% 0603 SMD", Storage Location="PCB Assembly WS", Supplier="ECE Dept"
R3: library part RS_150K, "RES 150K OHM 1/10W 5% 0603 SMD", Storage Location="PCB Assembly WS", Supplier="ECE Dept"
R4: library part RS_180K, "RES 180K OHM 1/10W 5% 0603 SMD", Storage Location="PCB Assembly WS", Supplier="ECE Dept"
R5: library part RS_100K, "RES 100K OHM 1/10W 5% 0603 SMD", Storage Location="PCB Assembly WS", Supplier="ECE Dept"
R6: library part RS_27K, "RES 27K OHM 1/10W 5% 0603 SMD", Storage Location="PCB Assembly WS", Supplier="ECE Dept"
R7 R14: library part RT_1R, "RES 1R OHM 1/4W 5% 1206 SMD", Storage Location="PCB Assembly WS", Supplier="ECE Dept"
R8: library part RS_47K, "RES 47.0K OHM 1/10W 5% 0603 SMD", Storage Location="PCB Assembly WS", Supplier="ECE Dept"
R9 R17 R22: library part RS_4K7, "RES 4.7K OHM 1/10W 5% 0603 SMD", Storage Location="PCB Assembly WS", Supplier="ECE Dept"
R10 R11 R13: library part RS_0R0, "RES 0.0 OHM 1/10W 5% 0603 SMD", Storage Location="PCB Assembly WS", Supplier="ECE Dept"
R12: library part RS_3K3, "RES 3.3K OHM 1/10W 5% 0603 SMD", Storage Location="PCB Assembly WS", Supplier="ECE Dept"
R15: library part RS_2K, "RES 2K OHM 1/10W 5% 0603 SMD", Storage Location="PCB Assembly WS", Supplier="ECE Dept"
R16: library part RS_56K, "RES 56.0K OHM 1/10W 5% 0603 SMD", Storage Location="PCB Assembly WS", Supplier="ECE Dept"
S1 S2 S3 S4: library part WS_EVQPNF05M, "Panasonic 6 x 3.5mm SMD Light Touch Switch Type SMD", Manufacturer=Panasonic, Supplier Part Number 1=2079481, Manufacturer PN=EVQPNF05M, PackageDescription="6.0 x 3.5 mm", Storage Location="PCB Assembly WS", Supplier="ECE Dept", Supplier 1=Farnell, Supplier 2=Digi-Key, Supplier Part Number 2=P13598SCT-ND
S5: "DIP Switch, 4 Position, SPST SMD", Contact Current DC Max=25, Manufacturer="OMRON ELECTRONIC COMPONENTS", Manufacturer Part Number=A6SN-4101, Supplier Part Number 1=2029425, Contact Configuration=SPST, External Length / Height=12.1, No. of Switch Positions=4, Pitch Spacing=2.54, Storage Location="PCB Assembly WS", Supplier="ECE Dept", Supplier 1=Farnell
U1: library part SE_ATSAM4S16BA-MU, "IC MCU 32BIT 512KB FLASH 64LQFP", Manufacturer=Atmel, Package / Case=64-LQFP, Supplier Part Number 1=ATSAM4S8BA-ANRCT-ND, Voltage - Supply (Vcc/Vdd)="1.62 V ~ 3.6 V", Code_JEDEC=MO-220VMMD-3, ComponentLink1Description="Manufacturer URL", ComponentLink1URL=http://www.atmel.com/, ComponentLink2Description="SAM4S Series Datasheet", ComponentLink2URL=http://www.atmel.com/dyn/resources/prod_documents/11100.pdf, ComponentLink3Description="SAM4S Series Summary", ComponentLink3URL=http://www.atmel.com/dyn/resources/prod_documents/11100S.pdf, Connectivity="I²C, IrDA, Memory Card, SPI, SSC, UART/USART, USB", Core Processor="ARM® Cortex®-M4", Core Size=32-Bit, Data Converters="A/D 11x12b, D/A 2x12b", Manufacturer Part Number=ATSAM4S8BA-ANR, Number of I/O=47, PackageDescription="64-Pin Quad Flat No-Lead (QFN) Sawn, 9 x 9 x 1.0 mm Body, 0.5 mm Pitch, Exposed Pad", PackageReference=64PS, PackageVersion="revJ, Jul-2007", Packaging="Cut Tape (CT)", Peripherals="Brown-out Detect/Reset, DMA, POR, PWM, WDT", Program Memory Size="512KB (512K x 8)", Program Memory Type=FLASH, RAM Size="128K x 8", Speed=120MHz, Supplier 1=Digi-Key
U2 U6: library part SV_CAT6219-330TDGT3, "IC REG LIN 3.3V 500MA TSOT23-5", Base Part Number=CAT6219, Current - Output=500mA, Package / Case="SOT-23-5 Thin, TSOT-23-5", Supplier Device Package=TSOT-23-5, Supplier Part Number=CAT6219-330TDGT3CT-ND, Voltage - Input (Max)=5.5V, Voltage - Output (Min/Fixed)=3.3V, Voltage Dropout (Max)="0.5V @ 500mA", ComponentLink1Description=http://www.onsemi.com/pub/Collateral/CAT6219-D.PDF, ComponentLink1URL=http://www.onsemi.com/pub/Collateral/CAT6219-D.PDF, ComponentLink2Description="CAT6219 Datasheet", ComponentLink2URL=\\maxwell\elecapp\AltiumDesigner\Libraries\DatasheetsNew\ENCE461\CAT6219-D.PDF, Manufacturer Part Number=CAT6219-330TDGT3, Supplier=Digi-Key, Supplier 1=Digi-Key
U3: "1.8V - 5V level converter"
U4: "Dual H-Bridge Motor Driver 1.5A", ComponentLink1Description="DRV8833 Datasheet", ComponentLink1URL=\\maxwell\elecapp\AltiumDesigner\Libraries\DatasheetsNew\ENCE461\drv8833pwpr.pdf
U5: library part NRF24, "nRF24 SMD Module", Warning="No power planes near or under device"
U14: library part ADP2302ARDZ-5.0-R7, "IC REG BUCK 5V 2A 8SOIC", Current - Output=2A, Frequency - Switching=700kHz, Supplier Part Number 1=ADP2302ARDZ-5.0-R7CT-ND, Voltage - Input (Max)=20V, Voltage - Output (Min/Fixed)=5V, ComponentLink1Description="ADP2302ARDZ-5.0 Datasheet", ComponentLink1URL=\\maxwell\elecapp\AltiumDesigner\Libraries\DatasheetsNew\ENCE461\ADP2302_2303.pdf, Manufacturer_Part_Number=ADP2302ARDZ-5.0-R7, Output Type=Fixed, Supplier 1=Digi-Key, Type=DEV, Vendor="Analog Devices Inc"
Y1: library part XT_CRYSTAL_12MHz_18pF, "CRYSTAL 12MHZ 18PF 6X3.5mm SMD", ESR (Equivalent Series Resistance)="60 Ohm", Frequency Stability=±50ppm, Frequency Tolerance=±30ppm, Load Capacitance=18pF, Manufacturer="CTS-Frequency Controls", Manufacturer Part Number=406C35D12M00000, Operating Mode=Fundamental, Operating Temperature="-20°C ~ 70°C", Package / Case="4-SMD, No Lead (DFN, LCC)", Supplier Part Number 1=CTX855CT-ND, Frequency=12MHz, Height="0.047\" (1.20mm)", Mounting Type="Surface Mount", Size / Dimension="0.236\" L x 0.138\" W (6.00mm x 3.50mm)", Supplier 1=Digi-Key

## Via types
v1: diameter 1, hole 0.5, Top Layer to Bottom Layer, 81 vias
v2: diameter 2.2, hole 1.6, Top Layer to Bottom Layer, 1 vias
v3: diameter 2, hole 1.5, Top Layer to Bottom Layer, 1 vias

## Nets (pads, with @x,y where several pads share a name; then routed paths per layer and width w, separated by ;. In a path a pad name is that pad's centre, name@x,y a point inside that pad or via, vN(x,y) a via of type N, cw(c..) or ccw(c..) an arc to the next point about the centre after c; other vN are vias at no path point)
3V3: 3V3.1 C5.2 C7.2 C9.2 C11.2 C13.1 DL1.2 DL2.2 H2.7 H2.8 P1.1 R9.1 R10.2 R17.2 R22.1 S3.1 S4.1 U1.1 U1.7 U1.18 U1.45 U1.58 U3.6 VDDIN.1 | length 72.7
  Top Layer w0.25: v1(32.2,62) 32.2,63.4 32.75,63.95 U1.7 ; v1(34.9,59.3) 36.35,60.75 U1.58 ; U1.1 36.525,65.525 v1@37.5,66.5 ; v1(46.2,79.2) 46.3,79.1 R17.2 ; 3V3.1 55.6,60 57.8,60 ; DL2.2 DL1.2 ; P1.1@61.2,82.12 P1.1
  Top Layer w0.3: v1(24.1,64.1) 24.95,63.25 U1.18 ; v1(27.4,50.8) 28.2,51.6 R22.1 ; VDDIN.1 v1(31.8,48.1) 31.8,49.4 32.4,50 R9.1 ; v1(32.6,56.7) 33.06,56.7 34.25,55.51 U1.45 ; 57.8,60 58.3,59.5 v1(58.3,58.1) 59.7,58.1 60.4,57.4 DL1.2
  Top Layer w0.5: v1(53.4,34.1) 51.8,34.1 R10.2 50.1,31.014 52.7,28.414 52.7,26.7 54.2,25.2 U3.6
  Top Layer w0.6: S4.1 23.7,43.5 S3.1 24.1,44.5 24.3,44.7 v1(24.3,46.6)
  Bottom Layer w0.25: C13.1 31.6,65.3 31.5,65.2 32.2,64.5 v1(32.2,62) ; v1(32.6,56.7) 32.625,56.675 32.625,55.825 33.7,54.75 C11.2 ; v1(34.9,59.3) 35.2,59.3 36.7,60.8 C7.2 ; C5.2 35.3,65.25 36.75,66.7 v1(37.5,66.7)
  Bottom Layer w0.3: v1(24.1,64.1) 24.289,64.1 24.589,63.8 C9.2
3V3_RADIO: R13.2 U5.1 | length 5.1
  Top Layer w0.3: U5.1@4,64.914 U5.1
  Top Layer w0.7: R13.2 U5.1@4,64.914
5V: C3.2 C23.2 H5.1 P1.2 R11.1 U2.1 U2.3 U3.1 U6.1 | length 117.1
  Top Layer w0.3: v1(5.4,28.7) v1@5.6,28.7
  Top Layer w0.5: v1@5.6,28.7 U6.1 ; C23.2 8.7,35.6 8.3,35.2 8.3,33.1 8.7,32.7 U6.1@9.1,32.7
  Top Layer w0.781: U6.1 U6.1@9.644,32.7
  Top Layer w0.8: v1(43.8,29.35) C3.2 ; U2.1 45.9,32.625 46.7,31.825 v1(46.7,29.5) ; U2.3 47.8,30.7 49,29.5 v1(49,29.3) ; v1(50.5,17.4) H5.1 57.6,20.14 U3.1
  Bottom Layer w0.7: R11.1 v1(32.3,26.1)
  Bottom Layer w0.781: v1(50.4,22.2) 59.3,22.2 62.7,25.6 62.7,59.343 62.008,60.035 59.166,60.035 57.6,61.6 57.6,69 61.3,72.7 61.3,80.04 P1.2
BATT_ADC: R3.1 R5.2 U1.11 | length 65.5
  Top Layer w0.3: v1(1.55,32.65) 1.55,25.25 R5.2 2,22.8 R3.1 ; U1.11 30.75,63.345 v1(30.8,63.295)
  Bottom Layer w0.3: v1(1.55,32.65) 16.85,32.65 28.8,44.6 28.8,60.498 30.8,62.498 v1(30.8,63.295)
Bumper_Sensor: Bump.1 H1.1 R17.1 U1.3 | length 35.6
  Top Layer w0.3: U1.3 34.75,66.125 34.775,66.15 34.775,66.675 35.409,67.309 v1(35.712,67.309) ; R17.1@47.6,78 48,77.6 50.3,77.6 Bump.1 53.1,74.8 H1.1
  Bottom Layer w0.3: v1(35.712,67.309) 36.009,67.309 36.7,68 48.6,68 55.4,74.8 H1.1
D_N: H4.2 R2.1 | length 16.4
  Top Layer w0.381: R2.1 45.2,59.3 46.648,59.3 51.905,64.557 59.293,64.557 H4.2
D_P: H4.3 R1.1 | length 16.2
  Top Layer w0.381: R1.1 45.2,60.4 46.85,60.4 51.642,65.192 59.293,65.192 H4.3
DEBUG_SW_1: Debug1.1 S3.2 U1.34 | length 24.6
  Top Layer w0.25: Debug1.1 29.025,38.225 29.025,53.165 28.75,53.44 U1.34
  Top Layer w0.3: S3.2 26.3,36.8 Debug1.1
DEBUG_SW_2: Debug2.1 S4.2 U1.33 | length 15.8
  Top Layer w0.3: S4.2@19.4,43.5 19.4,44.628 20.2,45.428 Debug2.1 21.7,47.7 21.9,47.9 22.305,47.9 27.5,53.095 28.25,53.845 U1.33
ERASE: Erase.1 U1.55 | length 15
  Top Layer w0.25: U1.55 40.45,59.25 41.3,58.4 42.658,58.4 43.358,57.7 46.967,57.7 47.967,58.7 49.35,58.7 Erase.1 50.3,59.7 50.7,60.1 Erase.1@50.7,59.95
GND: C1.1 C2.1 C3.1 C4.1 C5.1 C6.2 C7.1 C8.2 C9.1 C10.2 C11.1 C12.2 C13.2 C15.1 C18.1 C20.1 C32.1 C33.1 C34.1 D1.1 GND1.1 GND2.1 GND3.1 GND4.1 GND6.1 GND_B.1 H1.2 H2.5 H2.6 H3.1 H3.3 H4.5 H4.6 H5.3 J5.1 J5.2 P1.3 P1.4 Q1.1 R5.1 R7.1 R8.1 R16.1 S1.1 S2.1 S5.1 S5.2 S5.3 S5.4 U1.2 U1.17 U1.46 U1.60 U2.2 U3.2 U3.5 U4.3 U4.6 U4.13 U4.17 U5.2 U6.2 U14.7 U14.EPAD | length 163.1
  Top Layer w0.25: U5.2 5.357,63.043 v1(5.9,62.5) ; U6.2 11.647,33.65 12.097,34.1 v1(12.3,34.1) ; D1.1 D1.1@11.665,24.865 ; v1(15,35.9) 18.2,35.9 19,35.1 GND2.1 ; U14.EPAD@18.4,26.1 v3(19,25.5) ; S5.1 S5.2 S5.3 S5.4 22.2,74.68 v1(22.2,72) ; v1(28.6,68.8) 28.623,68.823 29.323,68.823 C8.2 29.95,69.4 30.25,69.1 31.1,69.1 C6.2 ; v1(34.5,52.1) 34.5,53.19 34.75,53.44 U1.46 ; v1(35.3,61.8) 35.35,61.75 U1.60 ; S1.1@40.975,46.225 41.65,46.9 S1.1 ; GND1.1 v1(45.8,42.9) ; C1.1 43,69.45 43.275,69.725 45.95,69.725 v1(46.062,69.838) 46.062,73.038 C15.1 ; H4.6@61.7,68.7 62,68.4 62,66.2 62,64.2 H4.6@62,61.7
  Top Layer w0.3: R5.1 10.6,23.8 D1.1 D1.1@10.8,25 ; S2.1 14.5,37.6 15,37.1 v1(15,35.9) ; U14.7 18.365,24.865 v3(19,25.5) ; v1(25.4,65.4) 26.163,64.637 26.163,64.062 U1.17 ; GND6.1 31.5,15.7 v1(31.6,15.6) ; U1.2 35.25,61.85 v1(35.3,61.8) ; S1.1 42.1,43.6 GND1.1 ; U4.3 42.3,19.707 42.743,20.15 43.075,20.15 43.275,20.35 v2(43.275,21.8) ; C12.2@42.3,57.4 C12.2 42.4,57.7 44,56.1 v1(44.6,56.1) ; v1(42.425,36.475) 44.125,36.475 C4.1 44,36.2 44,34.8 46.225,34.8 46.85,34.175 U2.2 ; C2.1 v1(47.7,66.1) ; C15.1 45.9,74.8 R7.1 ; U3.5 U3.2 57.775,25.975 57.6,26.2 58.8,26.2 59.4,25.6 v1(59.7,25.6) ; R8.1 55.9,66.5 H4.5@59.7,66.5 ; H4.5 H4.6@59.3,67.7 ; v1(61,6.6) GND4.1
  Top Layer w0.5: D1.1@10.8,25 C33.1 ; D1.1@11.665,24.865 U14.7 ; U4.13 42.96,24.59 42.96,23.565 43.275,23.25 v2(43.275,21.8) 44.25,20.825 U4.6
  Top Layer w0.781: Q1.1 R16.1 v1(24.9,13.5) ; H5.3 H5.3@59.94,17.5
  Top Layer w0.8: GND3.1 13.6,51.5 v1(14.3,52.2) ; GND_B.1 31.7,5.4 v1(31.9,5.4)
  Bottom Layer w0.25: v3(19,25.5) v3@19.1,25.5 ; C34.1 21,27.4 v3@19.1,25.5 ; C32.1 22.523,26.023 21.26,26.023 20.737,25.5 v3@19.1,25.5 ; v1(28.6,68.8) 30.1,67.3 C13.2 ; v1(34.5,52.1) 34.5,52.137 35.1,52.737 C11.1 ; v1(35.3,61.8) 35.6,61.8 36,62.2 ; C5.1@36.7,65.3 36,64.6 36,62.2 ; C7.1 36,62.2
  Bottom Layer w0.3: C10.2 25.4,62.4 C9.1 26.223,64.377 26.223,64.577 v1(25.4,65.4) ; C20.1@40,22.8 C18.1 42.975,21.5 v2(43.275,21.8)
H_Bridge_SLP: H_Sleep.1 U4.1 | length 6.8
  Top Layer w0.3: H_Sleep.1 38.4,19 U4.1
LED_3V3: 3V_LED.1 U1.49 U3.4 | length 49.5
  Top Layer w0.25: U1.49 39.45,54.325 41.785,54.325 41.975,54.135 41.975,50.3 38.667,50.3 38.4,50.033 38.4,42.325 39.725,41 51.2,41 54.8,37.4 54.8,29 55.2,28.6 U3.4
Net3V3_Reg_1: 3V3_Reg.1 C4.2 R10.1 U2.5 | length 13.7
  Top Layer w0.3: C4.2 45.9,36.3 U2.5
  Top Layer w0.5: C4.2 46,38 46.05,38.05 46.05,38.45 46.7,39.1 49,39.1 50.1,38 R10.1
NetAO1_1: AO1.1 P2.1 U4.2 | length 17.1
  Top Layer w0.5: 38.85,16.35 39.5,17 40.7,17 41.65,17.95 U4.2
  Top Layer w1.5: P2.1 38.5,9.3 38.5,13 AO1.1 38.85,13.35 38.85,16.35
NetAO2_1: AO2.1 P2.2 U4.4 | length 20
  Top Layer w0.4: 41.9,15.25 42.95,16.3 U4.4
  Top Layer w1.5: P2.2 34.725,2.985 35.185,2.985 40.9,8.7 41.4,8.7 AO2.1 41.6,14.95 41.9,15.25
NetB_OUT_1: B_OUT.1 C33.2 C34.2 L2.2 R11.2 U14.5 | length 39.3
  Top Layer w0.3: C33.2@12.3,27.4 C33.2 C33.2@12.5,27.3
  Top Layer w0.781: B_OUT.1 11.6,29.3 12.5,28.4 C33.2 ; U14.5 12.705,27.405 14.4,29.1 22.316,29.1 24.011,27.405 28.605,27.405 L2.2 28.55,27.7 27.75,28.5 26.9,28.5 26.3,29.1
  Bottom Layer w0.781: C34.2 19.3,29.1 20,29.8 25.6,29.8 26.3,29.1 ; v1(25.7,29.1) 26.4,29.1 26.7,28.8 R11.2
NetBO1_1: BO1.1 P3.1 U4.7 | length 22
  Top Layer w0.4: U4.7 44.9,18.4 ccw(c45.8,18.4) 45.8,17.5 46.6,17.4
  Top Layer w1.5: 46.6,17.4 47.5,17.4 47.983,16.917 55.65,9.25 55.686,9.214 BO1.1@55.686,8.7 ; BO1.1 57.3,7.5 P3.1
NetBO2_1: BO2.1 P3.2 U4.5 | length 27.1
  Top Layer w0.4: U4.5 43.6,18.222 44.3,17.522 44.3,17 45.5,15.8
  Top Layer w1.5: 45.5,15.8 45.7,15.6 45.7,12.8 P3.2@54.44,4.06 ; BO2.1 49.36,9.1 P3.2
NetC1_2: C1.2 U1.62 Y1.3 | length 9.4
  Top Layer w0.25: U1.62 39.417,62.75 40.175,63.508 40.175,64.085 40.625,64.535 40.625,66.825 Y1.3 41.2,68.6 41.325,68.725 41.325,69.125 C1.2
NetC2_2: C2.2 U1.61 Y1.1 | length 8.9
  Top Layer w0.25: U1.61 39.84,62.25 40.365,61.725 42.325,61.725 Y1.1 43.6,62.975 44.175,62.4 C2.2
NetC6_1: C6.1 C8.1 C10.1 C12.1 L1.2 U1.8 U1.12 U1.24 U1.54 VDDOUT.1 | length 53.1
  Top Layer w0.3: v1(23.3,60.5) 23.489,60.5 23.739,60.25 U1.24 ; v1(29.1,62) 29.9,62.8 29.9,63.597 30.25,63.947 U1.12 30.25,67.65 C8.1 31.8,68 C6.1@32.55,68.75 ; U1.8 32.225,65.55 32.225,66.7 32,66.925 32,68.1 C6.1@32.75,68.85 ; C6.1 32.7,70.7 VDDOUT.1 33.65,70.9 35.15,69.4 L1.2 37.305,69.4 39.3,67.405 v1(39.3,66.597) v1@39.3,66.568 ; v1(34.3,57.8) 35.302,57.8 36.252,58.75 U1.54@37.5,58.75 ; U1.54 U1.54@37.5,58.75 ; C12.1 40.223,58.077 39.398,58.077 38.75,58.725 37.525,58.725 U1.54@37.5,58.75
  Bottom Layer w0.3: v1(23.3,60.5) 23.489,60.5 23.8,60.811 24.511,60.811 C10.1 28.1,61 v1(29.1,62) ; v1(34.3,57.8) 35.945,57.8 38.407,60.262 38.407,64.109 39.3,65.002 v1(39.3,66.597)
NetC14_1: C14.1 R7.2 | length 2.6
  Top Layer w0.3: C14.1 42.827,76.027 43.573,76.027 43.6,76 R7.2
NetC14_2: C14.2 C15.2 L1.1 U1.64 | length 14.1
  Top Layer w0.3: U1.64@38.025,63.775 38.025,64.325 38.4,64.7 38.605,64.7 40.15,66.245 40.15,68.45 L1.1 42.1,72.3 C14.2 43.9,72.6 C15.2
NetC19_1: C19.1 U4.11 | length 6.3
  Top Layer w0.3: U4.11 44.25,23.893 45.243,22.9 v1(46.5,22.9)
  Bottom Layer w0.3: C19.1 45.5,22.9 v1(46.5,22.9)
NetC20_2: C20.2 U4.14 | length 6
  Top Layer w0.25: v1(39.6,24.6) 40.725,23.475 41.882,23.475 42.3,23.893 U4.14
  Bottom Layer w0.3: C20.2 38.7,23.7 v1(39.6,24.6)
NetC21_1: C21.1 C22.1 C23.1 | length 24.2
  Top Layer w0.3: C22.1 5.423,56.323 5.423,56.073 4.95,55.6 C21.1 4.2,54.6 4.85,53.95 4.85,44.621 3.473,43.244 3.473,40.156 5.389,38.24 5.76,38.24 C23.1@7.45,36.55
NetC21_2: C21.2 R14.1 Radio_Reg.1 U6.5 | length 28.1
  Top Layer w0.3: R14.1 2,57.397 2.6,56.797 C21.2 2.6,48.7 Radio_Reg.1 2.973,47.673 2.973,35.59 5.863,32.7 U6.5
NetC22_2: C22.2 R13.1 R14.2 | length 4.5
  Top Layer w0.3: R14.2 2,60.4 R13.1 5.5,58.4
NetC31_1: C31.1 D1.2 L2.1 U14.8 | length 23.7
  Top Layer w0.3: D1.2 16.45,17.55 C31.1 ; U14.8 16.689,21.411 C31.1 ; L2.1@28.8,18.2 19.9,18.2 C31.1
NetC31_2: C31.2 U14.1 | length 4.6
  Top Layer w0.3: C31.2 21.311,21.011 U14.1
NetDL1_1: DL1.1 R12.1 | length 2.2
  Top Layer w0.25: R12.1 58.6,56.1 DL1.1
NetDL2_1: DL2.1 R15.1 | length 2.3
  Top Layer w0.3: R15.1 58.6,54.7 DL2.1
NetF1_2: F1.2 H3.2 VBATT.1 | length 8.4
  Top Layer w0.7: H3.2 14.6,6.5 F1.2 VBATT.1@19.2,2.8
NetH5_2: H5.2 LED_D.1 U3.3 | length 14.6
  Top Layer w0.3: H5.2 57.4,18.783 62,23.383 LED_D.1 ; U3.3 60.6,27.1 LED_D.1@62.5,25.2
NetR1_2: R1.2 U1.57 | length 6.3
  Top Layer w0.3: U1.57 42.85,60.25 43.1,60.5 R1.2
NetR2_2: R2.2 U1.56 | length 6.4
  Top Layer w0.3: U1.56 42.55,59.75 43.1,59.2 R2.2
NetR4_1: R4.1 R16.2 U14.3 | length 19.9
  Top Layer w0.3: R4.1 20.7,15 20.7,15.7 21.9,16.9 v1(21.9,17) 21.9,16.95 23,15.85 23,15.2 R16.2 ; U14.3@21.654,26.135 23.965,26.135 v1(26.9,23.2)
  Bottom Layer w0.3: v1(21.9,17) 21.9,18.2 v1(26.9,23.2)
nRST: H2.1 S1.2 U1.39 | length 32.5
  Top Layer w0.3: v1(31.1,51.5) 31.25,51.65 U1.39 ; v1(45.2,50.3) 46.6,48.9 S1.2 46.865,46.635 56.425,46.635 H2.1
  Bottom Layer w0.3: v1(31.1,51.5) 32.3,50.3 v1(45.2,50.3)
PA17: P1.8 U1.4 | length 21.5
  Top Layer w0.3: v1(34,68.8) 34.25,68.55 U1.4
  Bottom Layer w0.3: v1(34,68.8) 34.602,68.8 40.3,74.498 40.3,79.3 43.4,82.4 P1.8
PA18: P1.7 U1.19 | length 38
  Top Layer w0.25: v1(22.3,64.1) 22.333,64.1 23.758,62.675 24.442,62.675 24.517,62.75 U1.19 ; v1(28.6,72.4) 28.725,72.275 35.508,72.275 35.958,72.725 36.825,72.725 46.27,82.17 P1.7@46.27,82.61
  Bottom Layer w0.25: v1(22.3,64.1) 22.3,66.1 v1(28.6,72.4)
PA19: P1.6 U1.5 | length 25.5
  Top Layer w0.3: v1(33.2,67.6) 33.2,67.3 33.725,66.775 33.725,66.234 33.725,66.15 33.75,66.125 U1.5 ; v1(36.5,71.9) 36.672,71.9 42.472,77.7 43.398,77.7 45.948,80.25 46.63,80.25 48.69,82.31 P1.6@48.69,82.49
  Bottom Layer w0.3: v1(33.2,67.6) 33.15,67.65 33.15,69.95 35.1,71.9 v1(36.5,71.9)
PA20: P1.5 U1.6 | length 29.8
  Top Layer w0.3: U1.6 33.25,64.293 33.9,63.644 v1(33.9,63.6)
  Bottom Layer w0.3: v1(33.9,63.6) 33.9,63.643 34.55,64.293 34.55,67.75 35.5,68.7 37.5,68.7 51.02,82.22 51.5,82.22 P1.5
PWM_IN_1: PWM1.1 U1.9 U4.16 | length 47.8
  Top Layer w0.25: v1(30.1,60.3) 30.1,61.428 31.75,63.078 U1.9
  Top Layer w0.3: v1(35.1,27.8) 35.1,27.7 PWM1.1 39.8,25.8 U4.16
  Bottom Layer w0.3: v1(30.1,60.3) 30.1,32.8 v1(35.1,27.8)
PWM_IN_2: PWM2.1 U1.44 U4.15 | length 38.4
  Top Layer w0.3: v1(31.2,39.4) 33.3,41.5 33.3,52.793 33.75,53.243 U1.44 ; v1(36.8,27.7) 38.9,27.7 39.1,27.9 40,27.9 40.3,28.2 40.7,27.8 PWM2.1 41.65,27.25 U4.15
  Bottom Layer w0.3: v1(31.2,39.4) 31.2,34.5 34.656,31.044 36.8,28.9 v1(36.8,27.7)
PWM_IN_3: PWM3.1 U1.48 U4.9 | length 42.9
  Top Layer w0.3: U1.48 37,53.225 37,42.4 40.5,38.9 40.5,34.4 v1(41.1,33.8) ; U4.9 PWM3.1 ; PWM3.1@49.5,24.8 49.5,26.05 50.5,27.05 v1(50.5,27.475)
  Bottom Layer w0.3: v1(41.1,33.8) 46.1,33.8 50.5,29.4 v1(50.5,27.475)
PWM_IN_4: PWM4.1 U1.47 U4.10 | length 41.3
  Top Layer w0.3: U1.47 35.25,53.25 35.7,52.8 35.7,42.4 39.6,38.5 v1(39.6,32.3) ; U4.10 44.9,26.35 45.75,27.2 PWM4.1 48.638,27.2 48.7,27.262 v1(48.7,27.1)
  Bottom Layer w0.3: v1(39.6,32.3) 42.052,32.3 47.252,27.1 v1(48.7,27.1)
Radio_CE: RC_CE.1 U1.29 U5.3 | length 27.4
  Top Layer w0.3: U5.3 6.629,63.5 8.7,61.429 8.7,57 10.25,57 10.8,56.45 22.059,56.45 23.359,57.75 U1.29
Radio_CSN: RC_CSN.1 U1.28 U5.4 | length 22.9
  Top Layer w0.3: U5.4 7.9,63.4 13.1,58.2 RC_CSN.1 22.702,57.8 23.152,58.25 U1.28
Radio_Enable: U1.30 U6.3 | length 32.8
  Top Layer w0.3: U6.3 10.8,35.8 v1(12,35.8) ; v1(20.1,55.1) 20.95,55.95 22.266,55.95 23.566,57.25 U1.30
  Bottom Layer w0.3: v1(12,35.8) 16.9,40.7 16.9,47.3 17,47.4 17,52 v1(20.1,55.1)
Radio_F_1: RF1.1 S5.8 U1.15 | length 26.7
  Top Layer w0.3: U1.15 28.75,66.125 28.725,66.15 28.725,66.623 26.9,68.448 26.9,82.6 34.9,82.6 RF1.1@35.5,83.2
Radio_F_2: RF2.1 S5.7 U1.14 | length 21.8
  Top Layer w0.3: U1.14 29.25,66.805 29.05,67.005 29.05,67.148 27.4,68.798 27.4,78.372 29.088,80.06 RF2.1@34.86,80.06
Radio_F_3: RF3.1 S5.6 U1.37 | length 35
  Top Layer w0.3: U1.37 30.25,56.55 v1(32.7,59) ; S5.6@31,77.52 34.92,77.52 RF3.1@35.4,78 ; RF3.1 35.3,77 v1(38.6,77)
  Bottom Layer w0.3: v1(32.7,59) 33.05,59.35 33.05,62.352 33,62.402 33,66.037 32.35,66.687 32.35,71.15 38.2,77 v1(38.6,77)
Radio_F_4: RF4.1 S5.5 U1.13 | length 20.3
  Top Layer w0.3: v1(28.914,63.5) 28.9,63.5 29.75,64.35 U1.13 ; v1(30.6,73.1) 30.6,74.39 S5.5 ; S5.5@30.99,74.98 31.21,75.2 RF4.1@35.2,75.2
  Bottom Layer w0.3: v1(28.914,63.5) 28.914,64.086 28.9,64.1 27.2,65.8 27.2,69.2 30.6,72.6 v1(30.6,73.1)
Radio_IRQ: RC_IRQ.1 U1.16 U5.8 | length 17.6
  Top Layer w0.3: U5.8 14.555,65 15.655,66.1 20.6,66.1 22.6,68.1 RC_IRQ.1 25.675,68.1 U1.16
Radio_MISO: RC_MISO.1 U1.27 U5.7 | length 27.5
  Top Layer w0.3: U5.7 11.714,63.986 12.8,62.9 14.95,62.9 16.35,64.3 RC_MISO.1 19.9,64.3 22.3,66.7 25.938,66.7 27.775,64.863 27.775,64.528 28.05,64.253 28.05,64.168 28.064,63.134 28.1,63.098 28.1,59.2 27.675,58.775 27.1,58.775 27.075,58.75 U1.27
Radio_MOSI: RC_MOSI.1 U1.22 U5.6 | length 25.4
  Top Layer w0.25: U5.6 10.443,63.5 12.693,61.25 RC_MOSI.1 ; RC_MOSI.1@16.4,61.4 17.85,61.4 22.675,66.225 25.742,66.225 26.671,65.296 26.671,64.876 27.575,63.972 27.6,62.1 27.625,62.075 27.625,61.25 U1.22
Radio_SCK: U1.21 U5.5 | length 21.1
  Top Layer w0.3: U5.5 9.171,63.5 12.771,59.9 17.041,59.9 18.891,61.75 U1.21
SLEEP: S2.2 U1.31 | length 19.7
  Top Layer w0.25: S2.2 14.5,47.512 23.738,56.75 U1.31
STAT0: R12.2 RED_LED.1 U1.63 | length 25.1
  Top Layer w0.25: U1.63 38.612,63.25 39.162,63.8 v1(39.3,63.8) ; v1(48.1,56.8) RED_LED.1 54.6,57.6 R12.2
  Bottom Layer w0.25: v1(39.3,63.8) 40.9,63.8 45.3,63.8 48.1,61 v1(48.1,56.8)
STAT1: GRE_LED.1 R15.2 U1.52 | length 25
  Top Layer w0.25: v1(48.188,54.288) 53.687,54.288 GRE_LED.1
  Top Layer w0.3: v1(35.6,56.682) 35.6,57 36.325,57.725 37.5,57.725 U1.52 ; GRE_LED.1 54.45,54.3 54.85,53.9 55.9,53.9 R15.2
  Bottom Layer w0.3: v1(35.6,56.682) 36.718,56.682 39.112,54.288 v1(48.188,54.288)
SWCLK: H2.2 U1.53 | length 27.4
  Top Layer w0.25: U1.53 37.55,58.225 38.53,58.225 41.53,55.225 42.157,55.225 42.507,54.875 45.053,54.875 47.341,52.587 48.613,52.587 50.9,50.3 55.612,50.3 59.64,46.272 H2.2
SWDIO: H2.4 SWDIO.1 U1.51 | length 29.1
  Top Layer w0.25: U1.51 38.843,57.25 41.318,54.775 41.971,54.775 42.321,54.425 44.867,54.425 47.192,52.1 47.45,52.1 50.65,48.9 56.305,48.9 58.465,46.74 58.465,44.595 H2.4
TW_CLK: R22.2 U1.36 | length 2
  Top Layer w0.25: R22.2@29.75,52.5 U1.36
TW_D: R9.2 U1.43 | length 2.9
  Top Layer w0.3: R9.2@32.5,52.2 32.6,52.2 32.3,52.5 33.225,53.425 33.225,54.45 U1.43
USB_DETECT: R6.1 R8.2 U1.59 USB_IN.1 | length 30.7
  Top Layer w0.3: U1.59 38.872,61.25 39.147,61.525 39.894,61.525 40.169,61.25 42.522,61.25 42.797,61.525 45.87,61.525 46.6,62.255 46.6,62.995 50.828,67.223 51.023,67.223 USB_IN.1@51.7,67.9 ; USB_IN.1 USB_IN.1@52.3,68.3 ; v1(53.2,62) 55.5,62 R6.1 ; v1(53.3,66.2) 52.7,66.8 52.7,67.9 USB_IN.1@52.3,68.3 ; R8.2 USB_IN.1@52.3,68.3
  Bottom Layer w0.3: v1(53.2,62) 53.25,62.05 53.25,66.05 53.3,66.1 v1(53.3,66.2)
VBAT: B_IN.1 C18.2 C19.2 C32.2 Q1.2 R3.2 R4.2 U4.12 U14.2 | length 84.3
  Top Layer w0.25: U14.2 21.695,24.865 22.66,23.9 v1(23.2,23.9)
  Top Layer w0.3: v1(42.8,27) 43.575,26.225 43.575,24.625 U4.12
  Top Layer w0.8: v1(7.5,20.6) R3.2 2,18.1 B_IN.1 2.2,15.9 4.6,13.5 R4.2 20.8,12 Q1.2
  Bottom Layer w0.8: v1(7.5,20.6) 18.5,20.6 C32.2 23.1,24.35 23.2,24.25 v1(23.2,23.9) 24.833,23.9 25.858,24.925 35.175,24.925 ; C18.2 37.8,21.5 36.725,22.575 36.725,23.375 35.175,24.925 ; C19.2 42.7,26.2 42.8,26.3 v1(42.8,27) 37.9,27 35.825,24.925 35.175,24.925
VBAT_IN: F1.1 Q1.3 VBATT_F.1 | length 7.9
  Top Layer w1.5: Q1.3 21.85,6.75 F1.1 22.1,4.8 VBATT_F.1@24,2.9
VBUS: H4.1 R6.2 | length 3.6
  Top Layer w0.5: R6.2@55.8,63.7 56,63.9 H4.1
pads on no net: H2.3 H2.9 H2.10 H4.4 U1.10 U1.20 U1.23 U1.25 U1.26 U1.32 U1.35 U1.38 U1.40 U1.41 U1.42 U1.50 U2.4 U4.8 U6.4 U14.4 U14.6 Y1.2 Y1.4
copper on no net: | length 1.8
  Top Layer w0.3: v1(24.7,59.3) 24.75,59.25 26.475,59.25 26.475,59.275